# Altium PCB PCB-NCMate-4_2023-08-02.pcbdoc (part 1 of 2)
Units mil, origin at the board's own origin, x right, y up, seen from the top; angles counter-clockwise.
Board outline 7109.99 x 5739.53 mil, 4 copper layers (Top Layer, Mid-Layer 1, Mid-Layer 2, Bottom Layer); 194 components, 159 nets, 662 pads, 368 vias.
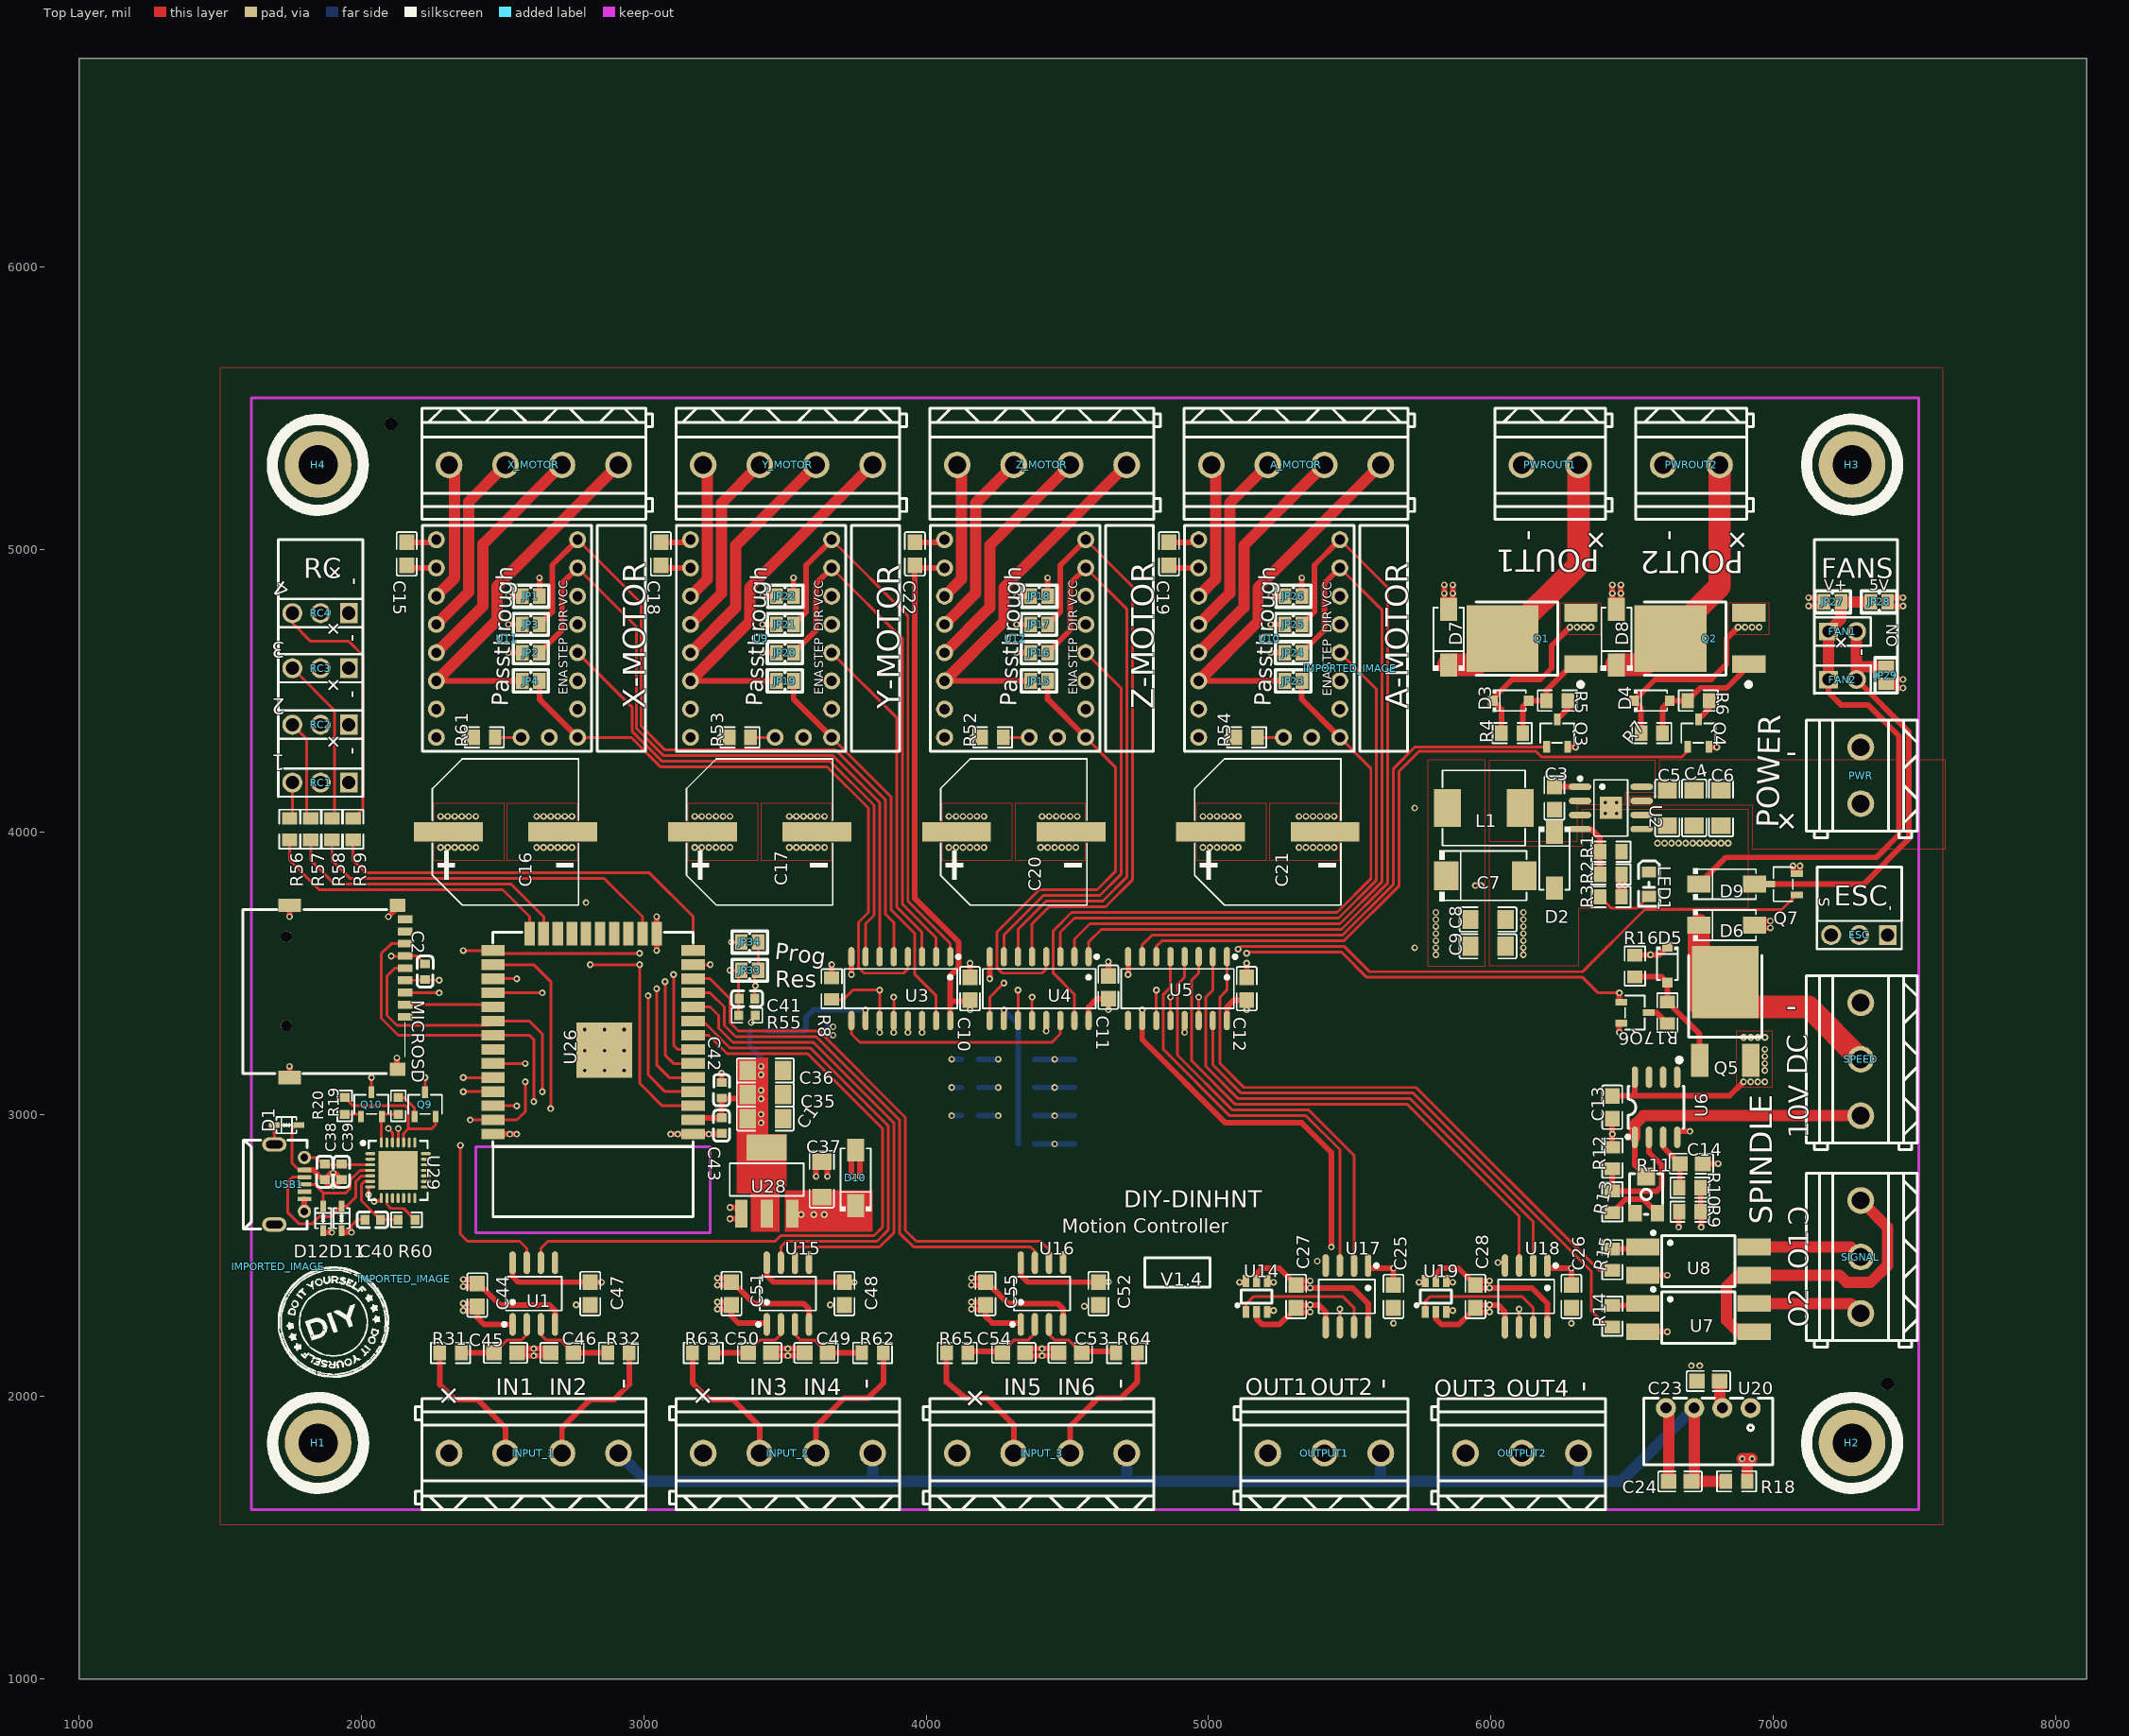
[diagram p0: Top Layer view]
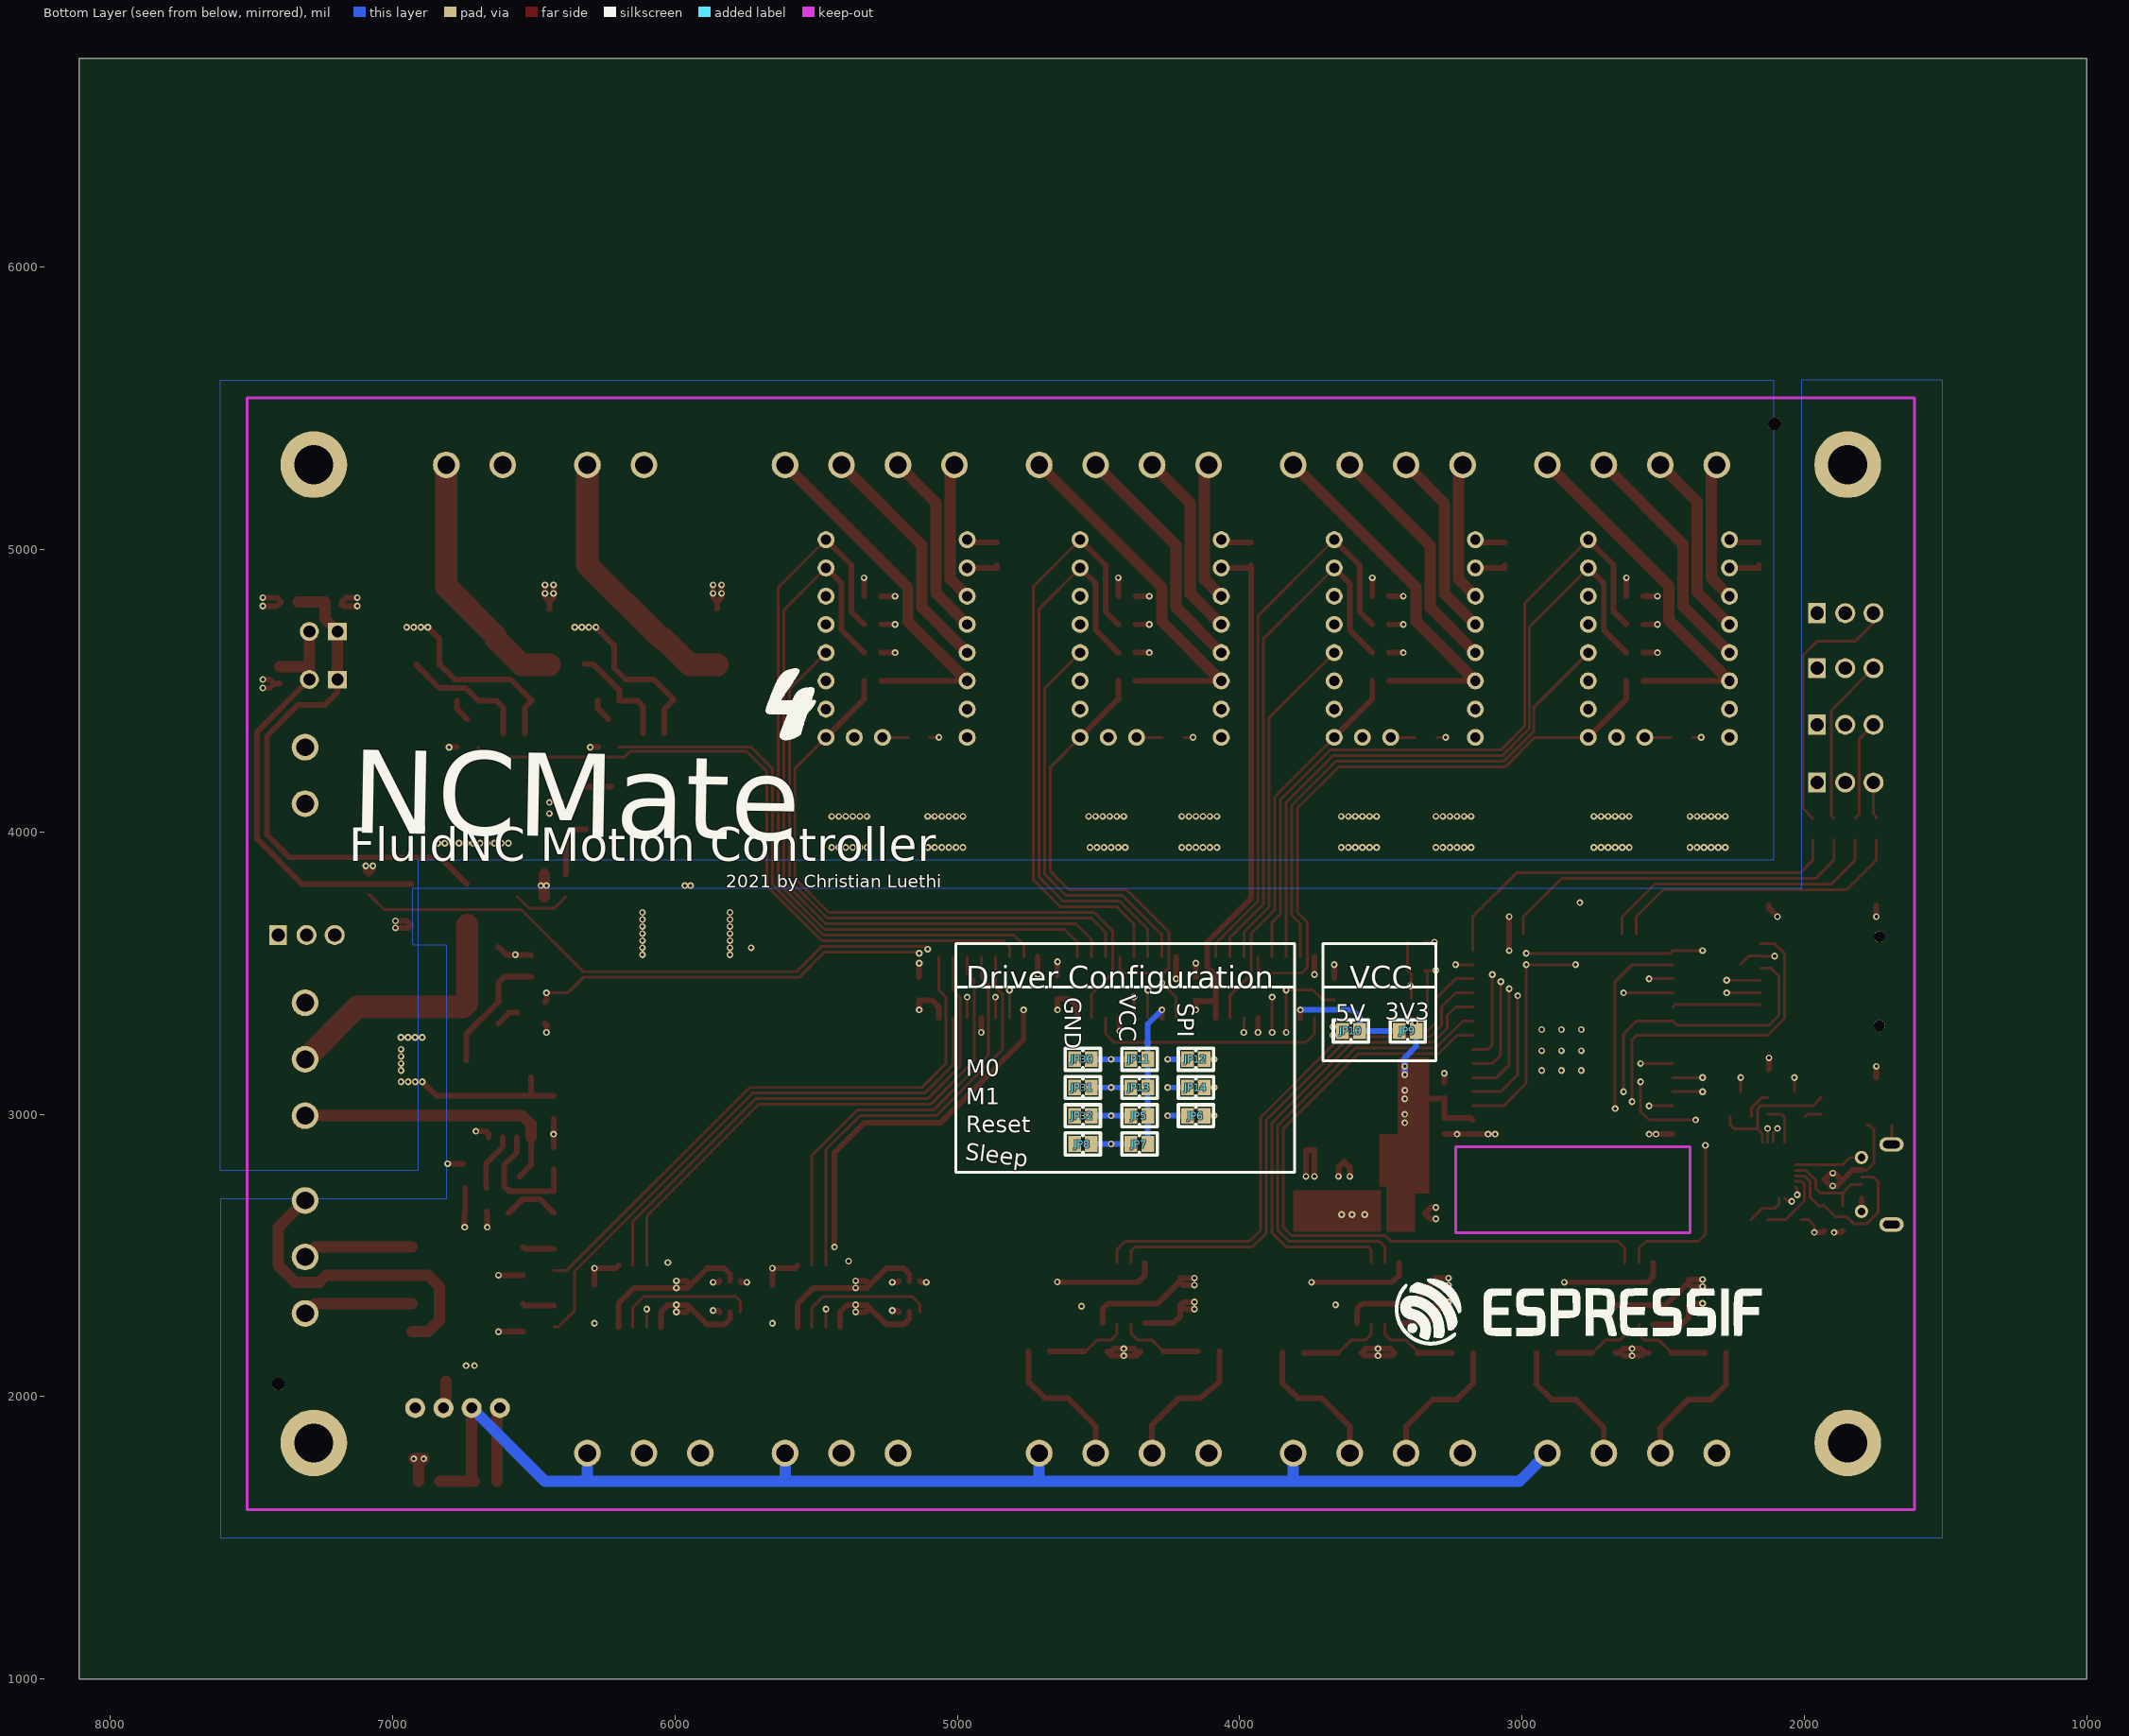
[diagram p1: Bottom Layer view, seen from below]
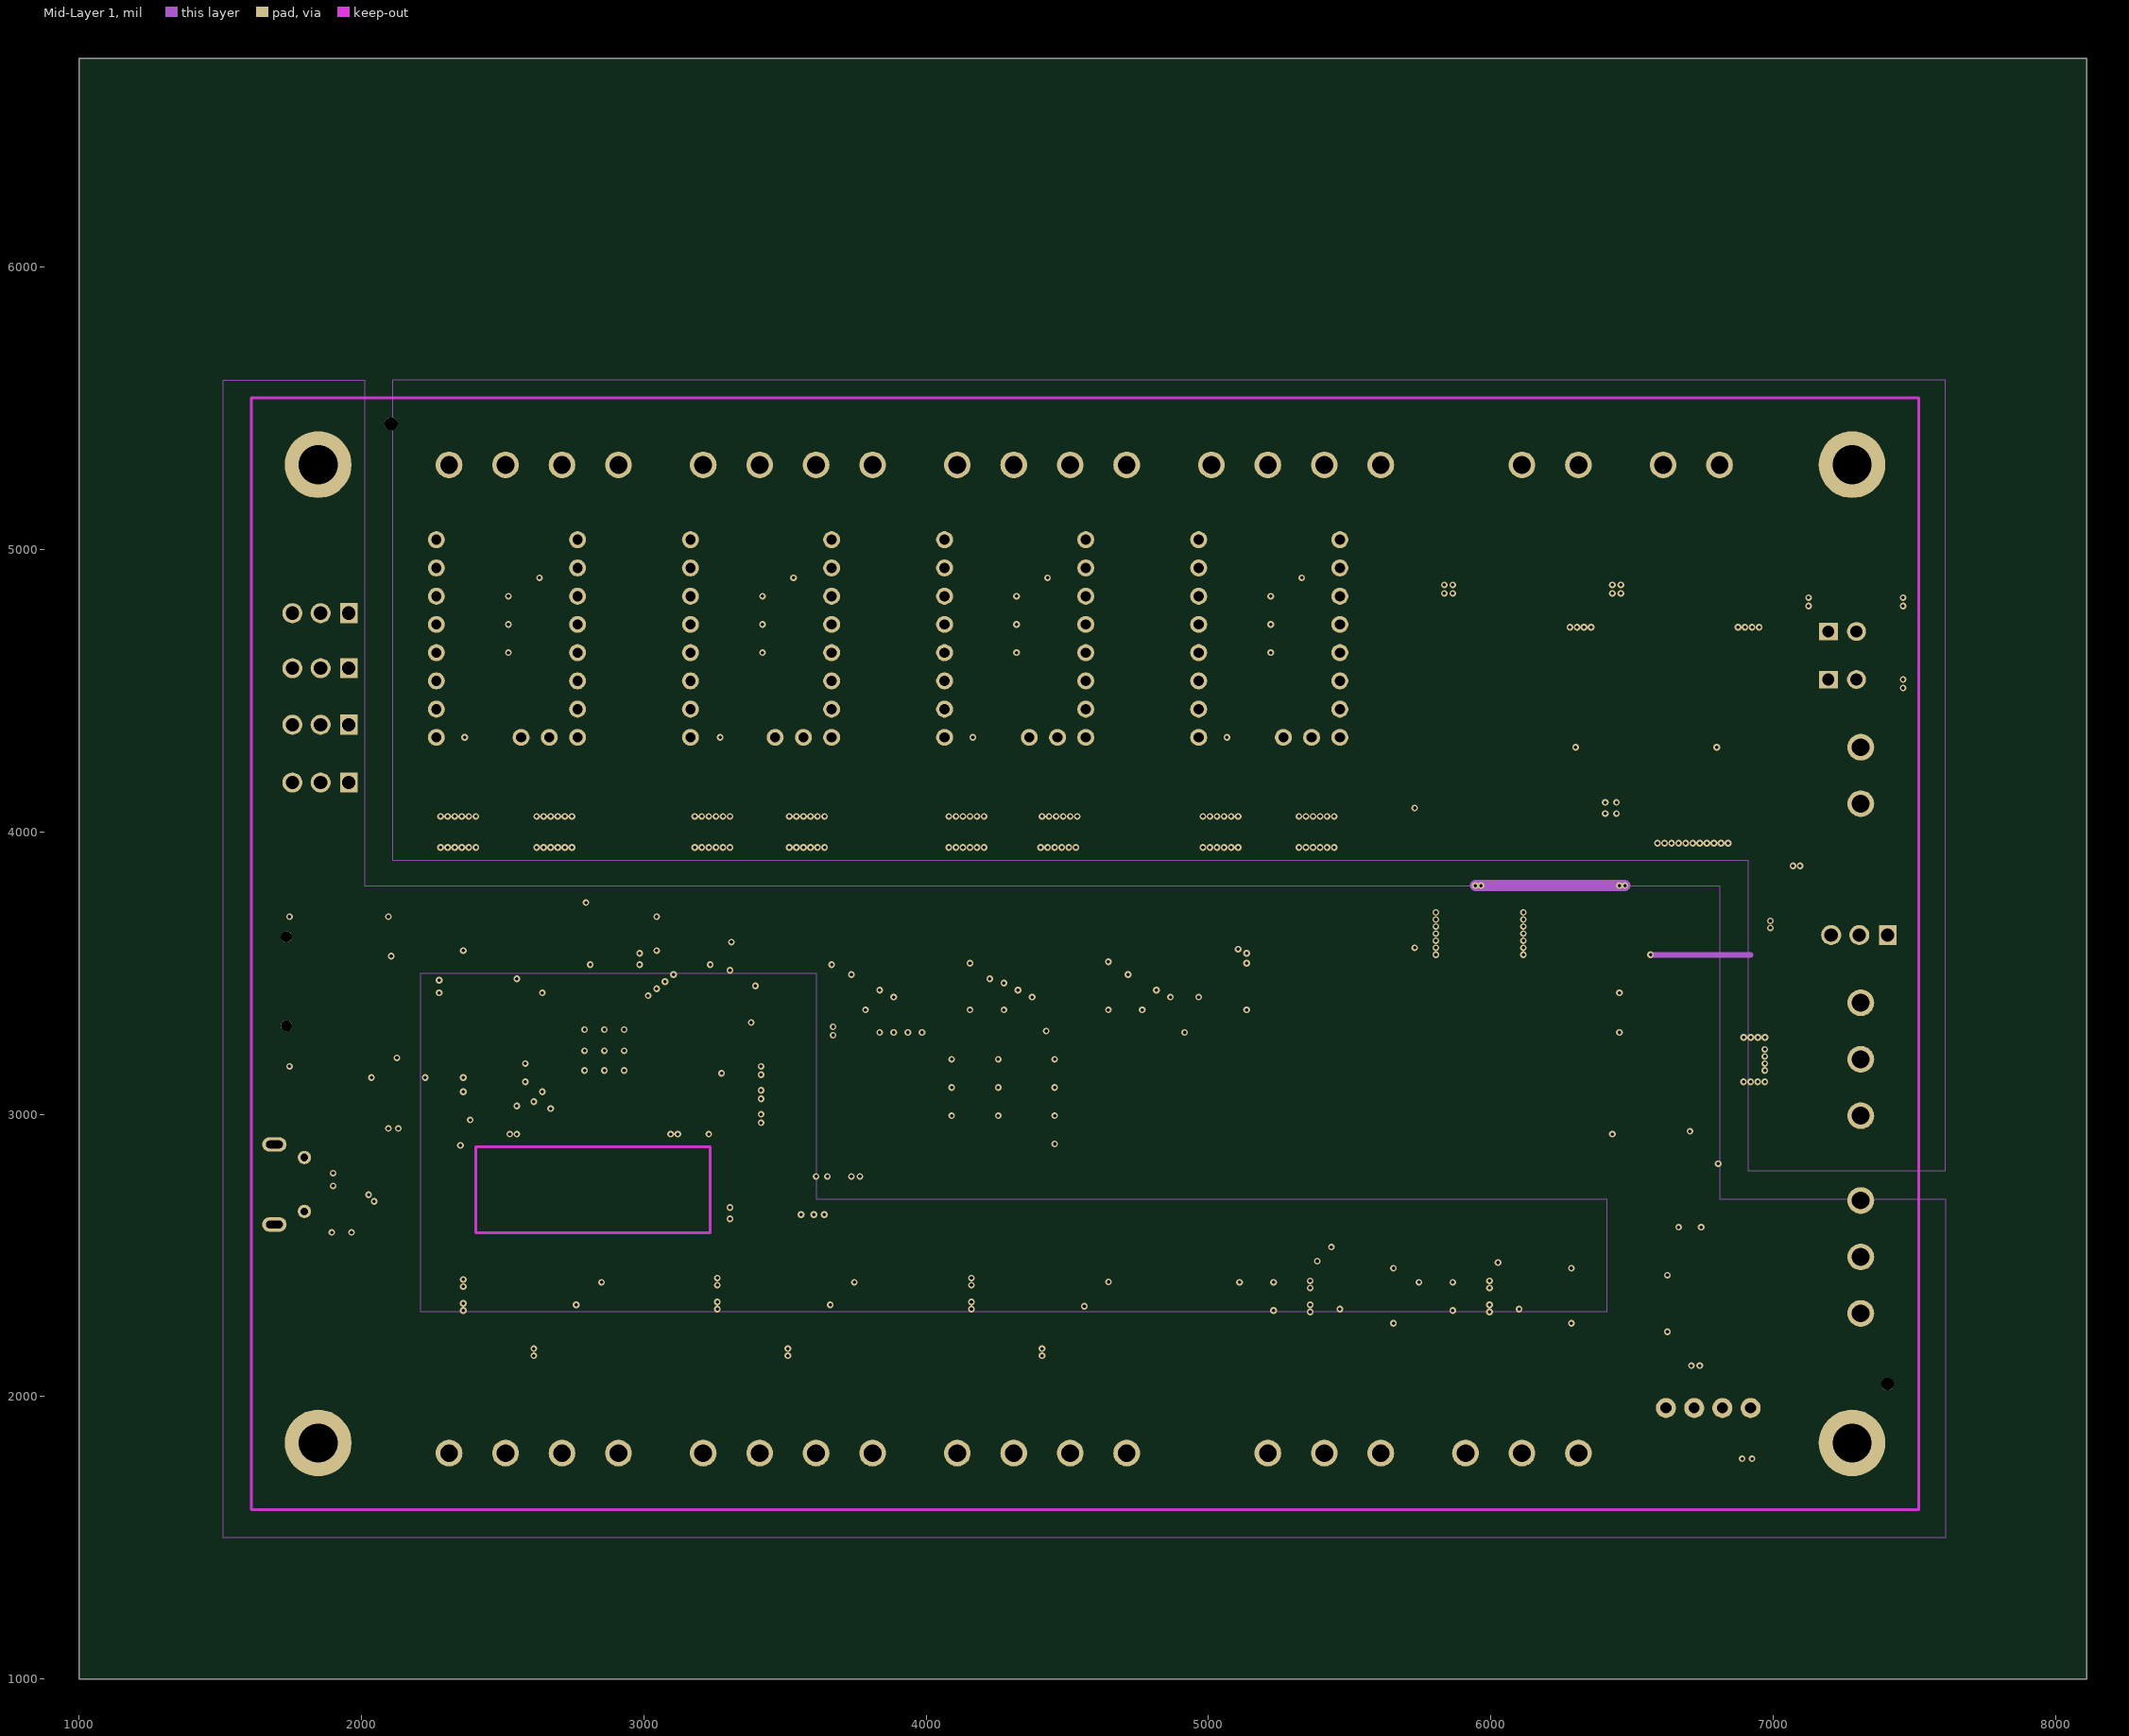
[diagram p2: Mid-Layer 1]
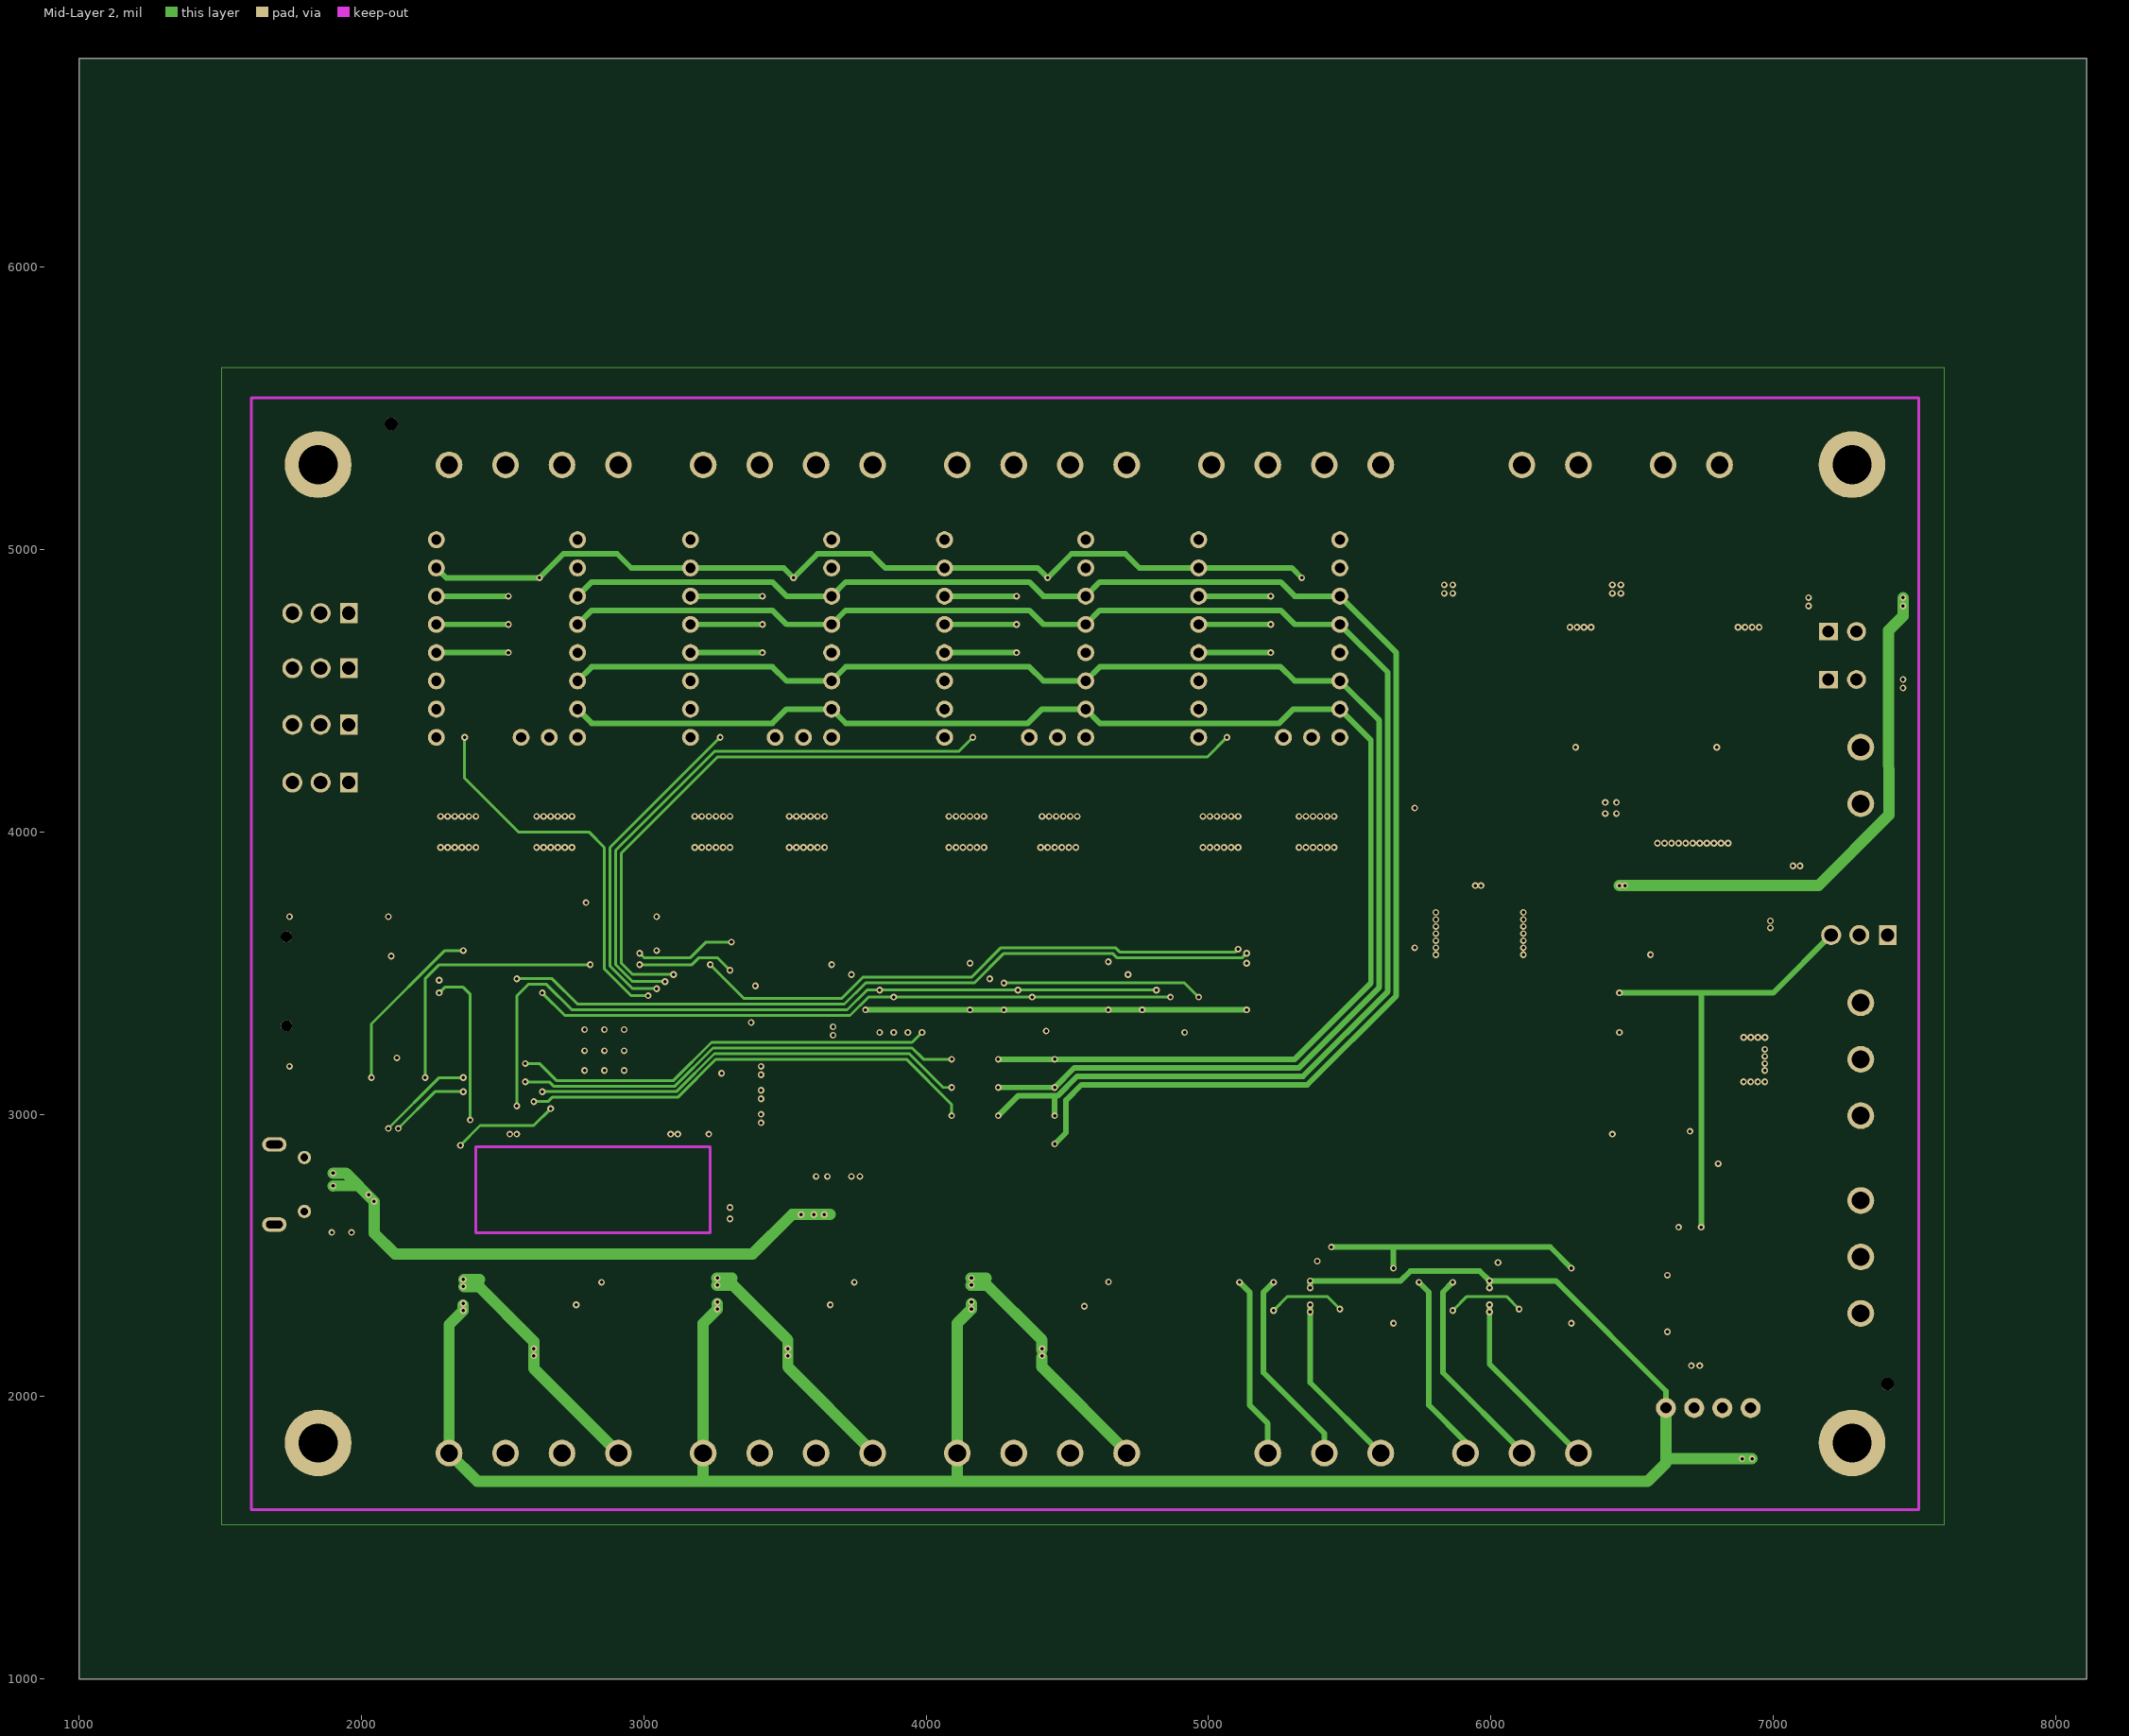
[diagram p3: Mid-Layer 2]

## Layer stack, top to bottom
Top Solder: solder mask 0.4, Solder Resist, Dk 3.5
Top Layer: signal copper 1.4
Dielectric1: dielectric 12.6, FR-4, Dk 4.8
Mid-Layer 1: signal copper 1.4
Dielectric3: dielectric 12.6, FR-4, Dk 4.8
Mid-Layer 2: signal copper 1.4
Dielectric2: dielectric 12.6, FR-4, Dk 4.8
Bottom Layer: signal copper 1.4
Bottom Solder: solder mask 0.4, Solder Resist, Dk 3.5

## Board outline
8109.99,1000 1000,1000 1000,6739.53 8109.99,6739.53

## Design rules (kind name [scope] priority, off if disabled: settings)
Clearance [All] p1: gap=10
PolygonConnect [All] p1: connectstyle=Relief reliefconductorwidth=10 reliefentries=4 polygonreliefangle="90 Angle" airgapwidth=10
RoutingVias [All] p1: holewidth=28 width=50 viastyle="Through Hole" minholewidth=28 minwidth=50 maxholewidth=28 maxwidth=50
SolderMaskExpansion [All] p1: expansion=4
Width [All] p1: maxlimit=10 minlimit=10 preferedwidth=10
30 further rules are at their usual default settings.

## Components (designator, comment, footprint, x,y, rotation, side; value= is the part's Value field where it differs from the comment)
A_MOTOR "DB128L-5.08-4P-GN-S" CONN-TH_4P-5.00_DB128L-5.0-4P-BU-S 5309.99,5300 r180 top
C1 "10uF" C1206 3430,2985 r180 top
C2 "100nF" C0603 2225,3505 r270 top
C3 "10nF" C0805 6224.99,4120 r270 top
C4 "2.2uF" C1206 6719.99,4085 r90 top
C5 "2.2uF" C1206 6624.99,4085 r90 top
C6 "10uF" C1206 6814.99,4085 r90 top
C7 "220uF" CAP-SMD_L7.3-W4.3-R-RD 5979.99,3845 r180 top
C8 "10uF" C1206 5989.99,3690 r180 top
C9 "2.2uF" C1206 5989.99,3595 r180 top
C10 "100nF" C0805 4154.99,3445 r270 top
C11 "100nF" C0805 4644.99,3450 r270 top
C12 "100nF" C0805 5134.99,3445 r270 top
C13 "100nF" C0805 6429.99,3025 r90 top
C14 "100nF" C0805 6709.99,2825 r180 top
C15 "100nF" C0805 2159.99,4985 r270 top
C16 "470uF" CAP-SMD_BD12.5-L13.0-W13.0-FD 2509.99,4000 r0 top
C17 "470uF" CAP-SMD_BD12.5-L13.0-W13.0-FD 3409.99,4000 r0 top
C18 "100nF" C0805 3059.99,4985 r270 top
C19 "100nF" C0805 4859.99,4985 r270 top
C20 "470uF" CAP-SMD_BD12.5-L13.0-W13.0-FD 4309.99,4000 r0 top
C21 "470uF" CAP-SMD_BD12.5-L13.0-W13.0-FD 5210,4000 r0 top
C22 "100nF" C0805 3959.99,4985 r270 top
C23 "100nF" C0805 6769.99,2055 r0 top
C24 "100nF" C0805 6669.99,1700 r180 top
C25 "100nF" C0805 5654.99,2355 r90 top
C26 "100nF" C0805 6284.99,2355 r90 top
C27 "100nF" C0805 5309.99,2355 r90 top
C28 "100nF" C0805 5944.99,2355 r90 top
C35 "10uF" C1206 3430,3070 r180 top
C36 "2.2uF" C1206 3430,3155 r180 top
C37 "10uF" C1206 3629.99,2770 r270 top
C38 "100nF" C0603 1869.32,2796.6 r270 top
C39 "1uF" C0603 1929.32,2796.6 r270 top
C40 "100nF" C0603 2039.32,2626.6 r0 top
C41 "100nF" C0603 3365,3410 r180 top
C42 "1uF" C0603 3275,3085 r270 top
C43 "100nF" C0603 3275,2960 r90 top
C44 "100nF" C0805 2409.99,2360 r270 top
C45 "100nF" C0805 2509.99,2155 r180 top
C46 "100nF" C0805 2709.99,2155 r0 top
C47 "100nF" C0805 2809.99,2365 r90 top
C48 "100nF" C0805 3709.99,2365 r90 top
C49 "100nF" C0805 3609.99,2155 r0 top
C50 "100nF" C0805 3409.99,2155 r180 top
C51 "100nF" C0805 3309.99,2365 r270 top
C52 "100nF" C0805 4609.99,2365 r90 top
C53 "100nF" C0805 4509.99,2155 r0 top
C54 "100nF" C0805 4309.99,2155 r180 top
C55 "100nF" C0805 4209.99,2365 r270 top
D1 "PESD5V0S1BA-N" SOD-323_L1.8-W1.3-LS2.5-BI 1734.32,2961.6 r0 top
D2 "SS54" SMA_L4.4-W2.8-LS5.4-R-RD 6224.99,3900 r270 top
D3 "BZT52C12" SOD-123_L2.7-W1.6-LS3.7-RD 6069.99,4465 r0 top
D4 "BZT52C12" SOD-123_L2.7-W1.6-LS3.7-RD 6569.99,4465 r0 top
D5 "BZT52C12" SOD-123_L2.7-W1.6-LS3.7-RD 6624.99,3530 r270 top
D6 "SS54" SMA_L4.4-W2.8-LS5.4-R-RD 6834.99,3670 r0 top
D7 "SS54" SMA_L4.4-W2.8-LS5.4-R-RD 5849.99,4690 r90 top
D8 "SS54" SMA_L4.4-W2.8-LS5.4-R-RD 6444.99,4690 r90 top
D9 "SS54" SMA_L4.4-W2.8-LS5.4-R-RD 6835,3815 r0 top
D10 "SS54" SMA_L4.4-W2.8-LS5.4-R-RD 3749.99,2775 r90 top
D11 "PESD5V0S1BA-N" SOD-323_L1.8-W1.3-LS2.5-BI 1929.32,2631.6 r90 top
D12 "PESD5V0S1BA-N" SOD-323_L1.8-W1.3-LS2.5-BI 1864.32,2631.6 r90 top
ESC "Header-Male-2.54_1x3" HDR-TH_3P-P2.54-V-M-1 7304.99,3635 r180 top
FAN1 "HDR-M-2.54_1x2" HDR-M-2.54_1X2 7245,4710 r0 top
FAN2 "HDR-M-2.54_1x2" HDR-M-2.54_1X2 7245,4540 r0 top
H1 "M3" "M3 CHASSIS" 1846.21,1836.22 r0 top
H2 "M3" "M3 CHASSIS" 7279.28,1836.22 r0 top
H3 "M3" "M3 CHASSIS" 7279.28,5300.79 r0 top
H4 "M3" "M3 CHASSIS" 1846.21,5300.79 r0 top
IMPORTED_IMAGE "Comment" IMPORTED_IMAGE 1703.97,2460.43 r0 top
IMPORTED_IMAGE "Comment" IMPORTED_IMAGE 2150.38,2418.01 r0 top
IMPORTED_IMAGE "Comment" IMPORTED_IMAGE 5501.47,4579.35 r0 top
INPUT_1 "DB128L-5.08-4P-GN-S" CONN-TH_4P-5.00_DB128L-5.0-4P-BU-S 2609.99,1800 r0 top
INPUT_2 "DB128L-5.08-4P-GN-S" CONN-TH_4P-5.00_DB128L-5.0-4P-BU-S 3509.99,1800 r0 top
INPUT_3 "DB128L-5.08-4P-GN-S" CONN-TH_4P-5.00_DB128L-5.0-4P-BU-S 4409.99,1800 r0 top
JP1 "JUMPER-PAD-2" JUMPER_SOLDER_2#1 2569.99,4835 r180 top
JP2 "JUMPER-PAD-2" JUMPER_SOLDER_2#1 2629.99,4635 r0 top
JP3 "JUMPER-PAD-2" JUMPER_SOLDER_2#1 2629.99,4735 r0 top
JP4 "JUMPER-PAD-2" JUMPER_SOLDER_2#1 2629.99,4535 r0 top
JP5 "JUMPER-PAD-2" JUMPER_SOLDER_2#2 4385.01,2995 r180 bottom
JP6 "JUMPER-PAD-2" JUMPER_SOLDER_2#2 4185.01,2995 r180 bottom
JP7 "JUMPER-PAD-2" JUMPER_SOLDER_2#2 4385.01,2895 r180 bottom
JP8 "JUMPER-PAD-2" JUMPER_SOLDER_2#2 4525.01,2895 r0 bottom
JP9 "JUMPER-PAD-2" JUMPER_SOLDER_2#2 3435,3295 r180 bottom
JP10 "JUMPER-PAD-2" JUMPER_SOLDER_2#2 3575,3295 r0 bottom
JP11 "JUMPER-PAD-2" JUMPER_SOLDER_2#2 4385.01,3195 r180 bottom
JP12 "JUMPER-PAD-2" JUMPER_SOLDER_2#2 4185.01,3195 r180 bottom
JP13 "JUMPER-PAD-2" JUMPER_SOLDER_2#2 4385.01,3095 r180 bottom
JP14 "JUMPER-PAD-2" JUMPER_SOLDER_2#2 4185.01,3095 r180 bottom
JP15 "JUMPER-PAD-2" JUMPER_SOLDER_2#1 4429.99,4535 r0 top
JP16 "JUMPER-PAD-2" JUMPER_SOLDER_2#1 4429.99,4635 r0 top
JP17 "JUMPER-PAD-2" JUMPER_SOLDER_2#1 4429.99,4735 r0 top
JP18 "JUMPER-PAD-2" JUMPER_SOLDER_2#1 4369.99,4835 r180 top
JP19 "JUMPER-PAD-2" JUMPER_SOLDER_2#1 3529.99,4535 r0 top
JP20 "JUMPER-PAD-2" JUMPER_SOLDER_2#1 3529.99,4635 r0 top
JP21 "JUMPER-PAD-2" JUMPER_SOLDER_2#1 3529.99,4735 r0 top
JP22 "JUMPER-PAD-2" JUMPER_SOLDER_2#1 3469.99,4835 r180 top
JP23 "JUMPER-PAD-2" JUMPER_SOLDER_2#1 5329.99,4535 r0 top
JP24 "JUMPER-PAD-2" JUMPER_SOLDER_2#1 5329.99,4635 r0 top
JP25 "JUMPER-PAD-2" JUMPER_SOLDER_2#1 5329.99,4735 r0 top
JP26 "JUMPER-PAD-2" JUMPER_SOLDER_2#1 5269.99,4835 r180 top
JP27 "JUMPER-PAD-2" JUMPER_SOLDER_2#1 7180,4815 r180 top
JP28 "JUMPER-PAD-2" JUMPER_SOLDER_2#1 7405,4815 r0 top
JP29 "JUMPER-PAD-2" JUMPER_SOLDER_2#1 7400,4585 r90 top
JP30 "JUMPER-PAD-2" JUMPER_SOLDER_2#2 4525.01,3195 r0 bottom
JP31 "JUMPER-PAD-2" JUMPER_SOLDER_2#2 4525,3095 r0 bottom
JP32 "JUMPER-PAD-2" JUMPER_SOLDER_2#2 4525.01,2995 r0 bottom
JP33 "JUMPER-PAD-2" JUMPER_SOLDER_2#1 3345,3510 r180 top
JP34 "JUMPER-PAD-2" JUMPER_SOLDER_2#1 3345,3610 r180 top
L1 "15uH" IND-SMD_L7.3-W6.6 5974.99,4085 r0 top
LED1 "0805G (Green)" LED0805-RD_GREEN 6559.99,3815 r270 top
MICROSD "TF-01A" TF-SMD_TF-01A 1950,3435 r270 top
OUTPUT1 "DB128L-5.08-3P" CONN-TH_DB128L-5.08-3P 5409.99,1800 r0 top
OUTPUT2 "DB128L-5.08-3P" CONN-TH_DB128L-5.08-3P 6109.99,1800 r0 top
PWR "DB128L-5.08-2P" CONN-TH_2P-P5.08_DB128L-5.08-2P 7309.99,4200 r90 top
PWROUT1 "DB128L-5.08-2P" CONN-TH_2P-P5.08_DB128L-5.08-2P 6209.99,5300 r180 top
PWROUT2 "DB128L-5.08-2P" CONN-TH_2P-P5.08_DB128L-5.08-2P 6709.99,5300 r180 top
Q1 "IRFR5305TRPBF" TO-252-3_L6.5-W5.8-P4.58-TR 6179.99,4685 r180 top
Q2 "IRFR5305TRPBF" TO-252-3_L6.5-W5.8-P4.58-TR 6774.99,4685 r180 top
Q3 "AO3400A" SOT-23-3_L2.9-W1.6-P1.90-LS2.8-BR 6234.99,4350 r270 top
Q4 "AO3400A" SOT-23-3_L2.9-W1.6-P1.90-LS2.8-BR 6734.99,4350 r270 top
Q5 "IRFR5305TRPBF" TO-252-3_L6.5-W5.8-P4.58-TR 6829.99,3330 r90 top
Q6 "AO3400A" SOT-23-3_L2.9-W1.6-P1.90-LS2.8-BR 6509.99,3360 r180 top
Q7 "AO3400A" SOT-23-3_L2.9-W1.6-P1.90-LS2.8-BR 7035,3815 r0 top
Q9 "S8050_C2146" SOT-23-3_L3.0-W1.7-P0.95-LS2.9-BR 2224.99,3035 r270 top
Q10 "S8050_C2146" SOT-23-3_L3.0-W1.7-P0.95-LS2.9-BR 2034.99,3035 r270 top
R1 "2.2K" R0805 6424.99,3930 r0 top
R2 "8.2K" R0805 6424.99,3850 r180 top
R3 "3K" R0805 6425,3770 r0 top
R4 "10K" R0805 6074.99,4350 r0 top
R5 "10K" R0805 6234.99,4465 r0 top
R6 "10K" R0805 6734.99,4465 r0 top
R7 "10K" R0805 6569.99,4350 r0 top
R8 "10K" R0805 3664.99,3445 r90 top
R9 "10K" R0805 6704.99,2655 r180 top
R10 "10K" R0805 6704.99,2740 r180 top
R11 "22K" RES-ADJ-SMD_VG039NCH 6549.99,2715 r270 top
R12 "10K" R0805 6429.99,2845 r270 top
R13 "4.7K" R0805 6429.99,2690 r270 top
R14 "220" R0805 6429.99,2285 r90 top
R15 "220" R0805 6429.99,2485 r90 top
R16 "10K" R0805 6509.99,3525 r270 top
R17 "10K" R0805 6624.99,3360 r270 top
R18 "220" R0805 6869.99,1700 r0 top
R19 "10K" R0603 2129.99,3030 r270 top
R20 "10K" R0603 1939.99,3030 r270 top
R31 "10K" R0805 2314.99,2155 r180 top
R32 "10K" R0805 2909.99,2155 r0 top
R52 "330" R0805 4235,4335 r180 top
R53 "330" R0805 3340,4335 r180 top
R54 "330" R0805 5135,4335 r180 top
R55 "10K" R0603 3365,3350 r0 top
R56 "220" R0805 1744.99,4010 r90 top
R57 "220" R0805 1819.99,4010 r90 top
R58 "220" R0805 1894.99,4010 r90 top
R59 "220" R0805 1969.99,4010 r90 top
R60 "10K" R0603 2159.32,2626.6 r180 top
R61 "330" R0805 2435,4335 r180 top
R62 "10K" R0805 3809.99,2155 r0 top
R63 "10K" R0805 3209.99,2155 r180 top
R64 "10K" R0805 4709.99,2155 r0 top
R65 "10K" R0805 4109.99,2155 r180 top
RC1 "Header-Male-2.54_1x3" HDR-TH_3P-P2.54-V-M-1 1854.99,4175 r180 top
RC2 "Header-Male-2.54_1x3" HDR-TH_3P-P2.54-V-M-1 1854.99,4380 r180 top
RC3 "Header-Male-2.54_1x3" HDR-TH_3P-P2.54-V-M-1 1854.99,4580 r180 top
RC4 "Header-Male-2.54_1x3" HDR-TH_3P-P2.54-V-M-1 1854.99,4775 r180 top
SIGNAL "DB128L-5.08-3P" CONN-TH_DB128L-5.08-3P 7309.99,2495 r90 top
SPEED "DB128L-5.08-3P" CONN-TH_DB128L-5.08-3P 7309.99,3195 r90 top
U1 "CBMUD1200HAS8" SOIC-8_L4.9-W3.9-P1.27-LS6.0-BL 2609.99,2365 r0 top
U2 "TPS5430DDAR" SOIC-8_L5.0-W4.0-P1.27-LS6.0-BL-EP2.0 6424.99,4085 r270 top
U3 "74AHCT595D,118" SOP-16_L10.0-W3.9-P1.27-LS6.0-BL 3910,3445 r180 top
U4 "74AHCT595D,118" SOP-16_L10.0-W3.9-P1.27-LS6.0-BL 4400,3445 r180 top
U5 "74AHCT595D,118" SOP-16_L10.0-W3.9-P1.27-LS6.0-BL 4890,3445 r180 top
U6 "LM358DR2G" SOIC-8_L5.0-W4.0-P1.27-LS6.0-BL 6584.99,3025 r0 top
U7 "EL817S1(C)(TU)-F" OPTO-SMD-4_L4.6-W6.5-P2.54-LS10.3-TL 6734.99,2280 r0 top
U8 "EL817S1(C)(TU)-F" OPTO-SMD-4_L4.6-W6.5-P2.54-LS10.3-TL 6734.99,2480 r0 top
U9 "SilentStepStick_TMC5160_V1.4" SILENTSTEPSTICK_TMC5160 3364.99,5035 r180 top
U10 "SilentStepStick_TMC5160_V1.4" SILENTSTEPSTICK_TMC5160 5164.99,5035 r180 top
U11 "SilentStepStick_TMC5160_V1.4" SILENTSTEPSTICK_TMC5160 2464.99,5035 r180 top
U12 "SilentStepStick_TMC5160_V1.4" SILENTSTEPSTICK_TMC5160 4264.99,5035 r180 top
U14 "74LVC2G17GV,125" SC-74-6_L3.0-W1.5-P0.95-LS2.8-BL 5169.99,2355 r0 top
U15 "CBMUD1200HAS8" SOIC-8_L4.9-W3.9-P1.27-LS6.0-BL 3509.99,2365 r0 top
U16 "CBMUD1200HAS8" SOIC-8_L4.9-W3.9-P1.27-LS6.0-BL 4409.99,2365 r0 top
U17 "CBMUD1200HAS8" SOIC-8_L4.9-W3.9-P1.27-LS6.0-BL 5489.99,2355 r180 top
U18 "CBMUD1200HAS8" SOIC-8_L4.9-W3.9-P1.27-LS6.0-BL 6124.99,2355 r180 top
U19 "74LVC2G17GV,125" SC-74-6_L3.0-W1.5-P0.95-LS2.8-BL 5804.99,2355 r0 top
U20 "B0505S-1W_C882272" PWRM-TH_BXXXXS-1WR3 6769.99,1960 r180 top
U26 "ESP32-WROOM-32D(16MB)" WIFIM-SMD_39P-L25.5-W18.0-P1.27-BL 2820,3285 r90 top
U28 "AMS1117-3.3" SOT-223-3_L6.5-W3.4-P2.30-LS7.0-BR 3435,2765 r270 top
U29 "CP2102-GMR" QFN-28_L5.0-W5.0-P0.50-BL-EP 2129.32,2801.6 r270 top
USB1 "micro USBFemale" MICRO-USB-SMD_5P-P0.65-H-F_C10418 1744.32,2751.6 r270 top
X_MOTOR "DB128L-5.08-4P-GN-S" CONN-TH_4P-5.00_DB128L-5.0-4P-BU-S 2609.99,5300 r180 top
Y_MOTOR "DB128L-5.08-4P-GN-S" CONN-TH_4P-5.00_DB128L-5.0-4P-BU-S 3509.99,5300 r180 top
Z_MOTOR "DB128L-5.08-4P-GN-S" CONN-TH_4P-5.00_DB128L-5.0-4P-BU-S 4409.99,5300 r180 top

## Footprints (in the part's own frame and the unit in brackets; to place one, negate y for a bottom-side part, rotate by r counter-clockwise, add the part's x,y. Pads: shape width x height; smd on the part's side, far side on the other; paste and mask are expansions set on the pad)
C0603 [mm]
  rect 0.8x0.9 smd paste+0 mask+0.051: 1(-0.7,0) 2(0.7,0)
  silkscreen extent -1.41,-0.71 1.39,0.72
C0805 [mm]
  rect 1.41x1.35 smd paste-100 mask+0.051: 1(-1.03,0) 2(1.03,0)
  silkscreen extent -1.96,-0.9 1.96,0.9
C1206 [mm]
  rect 1.485x1.728 smd paste-100 mask+0.051: 1(-1.593,0) 2(1.593,0)
  silkscreen extent -2.56,-1.09 2.56,1.09
CAP-SMD_BD12.5-L13.0-W13.0-FD [mm]
  rect 6.2x1.75 smd paste+0 mask+0.051: 1(-5.145,0) 2(5.145,0)
  silkscreen extent -6.58,-6.58 6.58,6.58
CAP-SMD_L7.3-W4.3-R-RD [mil]
  rect 86.91x102.05 smd paste+0 mask+2: 1(138.24,0) 2(-138.24,0)
  silkscreen extent -147,-91 162,91
CONN-TH_2P-P5.08_DB128L-5.08-2P [mm]
  round 2.4 hole 1.6 paste+0 mask+0.051: 1(-2.54,0) 2(2.54,0)
  silkscreen extent -5.59,-5.1 4.99,4.9
CONN-TH_4P-5.00_DB128L-5.0-4P-BU-S [mm]
  round 2.4 hole 1.6 paste+0 mask+0.051: 1(-7.62,0) 2(-2.54,0) 3(2.54,0) 4(7.62,0)
  silkscreen extent -10.67,-5.1 10.07,4.9
CONN-TH_DB128L-5.08-3P [mm]
  round 2.4 hole 1.6 paste+0 mask+0.051: 1(-5.08,0) 2(0,0) 3(5.08,0)
  silkscreen extent -8.13,-5.1 7.53,4.9
HDR-M-2.54_1X2 [mm]
  rect 1.7x1.575 hole 1.1 paste+0 mask+0.051: 1(-1.27,0)
  round 1.7 hole 1.1 paste+0 mask+0.051: 2(1.27,0)
  silkscreen extent -2.54,-1.27 2.54,1.27
HDR-TH_3P-P2.54-V-M-1 [mm]
  rect 1.575x1.8 hole 1.2 paste+0 mask+0.051: 1(-2.54,0)
  round 1.8 hole 1.2 paste+0 mask+0.051: 2(0,0) 3(2.54,0)
  silkscreen extent -3.81,-1.27 3.81,1.27
IMPORTED_IMAGE [mil]
  silkscreen extent 0,-394 394,0
IND-SMD_L7.3-W6.6 [mm]
  rect 2.424x3.42 smd paste+0 mask+0.051: 1(3.278,0) 2(-3.278,0)
  silkscreen extent -3.73,-3.38 3.73,3.38
JUMPER_SOLDER_2#1 [mil]
  rect 45x56 smd paste+0 mask+4: 1(-60,0) 2(0,0)
  silkscreen extent -93,-39 32,39
JUMPER_SOLDER_2#2 [mil]
  rect 45x56 smd paste+0 mask+4: 1(60,0) 2(0,0)
  silkscreen extent -32,-39 93,39
LED0805-RD_GREEN [mm]
  rect 1x1.25 smd paste+0 mask+0.051: 1(-1.1,0) 2(1.1,0)
  silkscreen extent -2.1,-0.95 1.98,0.96
"M3 CHASSIS" [mm]
  round 6 hole 3.5 paste+0 mask+0.102: 1(0,0)
MICRO-USB-SMD_5P-P0.65-H-F_C10418 [mm]
  oval 1.3x2.2 hole 0.7 slot 1.5 at 90 deg paste+0 mask+0.051: 0(-3.6,-1.35) 0(3.6,-1.35)
  round 1.2 hole 0.7 paste+0 mask+0.051: 0(-2.425,1.35) 0(2.425,1.35)
  rect 0.4x1.25 smd paste-100 mask+0.051: 1(-1.3,1.35) 2(-0.65,1.35) 3(0,1.35) 4(0.65,1.35) 5(1.3,1.35)
  silkscreen extent -4,-4.15 4,1.61
OPTO-SMD-4_L4.6-W6.5-P2.54-LS10.3-TL [mm]
  rect 3x1.5 smd paste+0 mask+0.051: 1(-5,1.27) 2(-5,-1.27) 3(5,-1.27) 4(5,1.27)
  silkscreen extent -4.21,-2.3 3.3,2.69
PWRM-TH_BXXXXS-1WR3 [mm]
  round 1.8 hole 1 paste+0 mask+0.051: 1(-3.81,0) 2(-1.27,0) 3(1.27,0) 4(3.81,0)
  silkscreen extent -5.8,-0.9 5.8,5.1
QFN-28_L5.0-W5.0-P0.50-BL-EP [mm]
  oval 0.28x0.9 smd paste+0 mask+0.051: 1(-1.501,-2.5) 2(-1.001,-2.5) 3(-0.501,-2.5) 4(0,-2.5) 5(0.5,-2.5) 6(1.001,-2.5) 7(1.501,-2.5) 15(1.501,2.5) 16(1.001,2.5) 17(0.5,2.5) 18(0,2.5) 19(-0.501,2.5) 20(-1.001,2.5) 21(-1.501,2.5)
  oval 0.9x0.28 smd paste+0 mask+0.051: 8(2.5,-1.501) 9(2.5,-1.001) 10(2.5,-0.5) 11(2.5,0) 12(2.5,0.5) 13(2.5,1.001) 14(2.5,1.501) 22(-2.5,1.501) 23(-2.5,1.001) 24(-2.5,0.5) 25(-2.5,0) 26(-2.5,-0.5) 27(-2.5,-1.001) 28(-2.5,-1.501)
  rect 3.5x3.5 smd paste+0 mask+0.051: 29(0,0)
  silkscreen extent -2.65,-3.3 2.65,2.65
R0603 [mil]
  rect 31.75x34.02 smd paste-3937.01 mask+2: 1(-29.66,0) 2(29.66,0)
  silkscreen extent -55,-26 55,26
R0805 [mil]
  rect 44.59x54.21 smd paste-3937.01 mask+2: 1(-38.04,0) 2(38.04,0)
  silkscreen extent -69,-36 69,36
RES-ADJ-SMD_VG039NCH [mm]
  rect 1.5x1.2 smd paste+0 mask+0.051: 1(1.65,-1) 3(1.65,1)
  rect 1.6x1.6 smd paste+0 mask+0.051: 2(-1.65,0)
  silkscreen extent -1.9,-1.5 1.75,1.5
SC-74-6_L3.0-W1.5-P0.95-LS2.8-BL [mil]
  rect 24x43 smd paste+0 mask+2: 1(-37.4,-55) 2(0,-55) 3(37.4,-55) 4(37.4,55) 5(0,55) 6(-37.4,55)
  silkscreen extent -74,-37 55,24
SILENTSTEPSTICK_TMC5160 [mil]
  round 60 hole 36 paste+0 mask+4: 1(-300,700) 2(-300,600) 3(-300,500) 4(-300,400) 5(-300,300) 6(-300,200) 7(-300,100) 8(-300,0) 9(200,700) 10(200,600) 11(200,500) 12(200,400) 13(200,300) 14(200,200) 15(200,100) 16(200,0) 17(-200,700) 18(-100,700)
  silkscreen extent -350,-50 250,750
SMA_L4.4-W2.8-LS5.4-R-RD [mil]
  rect 81.2x60.59 smd paste+0 mask+2: 1(98.57,0) 2(-98.57,0)
  silkscreen extent -119,-56 104,56
SOD-123_L2.7-W1.6-LS3.7-RD [mm]
  rect 0.88x0.96 smd paste+0 mask+0.051: 1(-1.61,0) 2(1.61,0)
  silkscreen extent -1.6,-1 1.38,1
SOD-323_L1.8-W1.3-LS2.5-BI [mm]
  rect 0.985x0.49 smd paste+0 mask+0.051: 1(-1.117,0) 2(1.117,0)
  silkscreen extent -0.9,-0.73 0.9,0.73
SOIC-8_L4.9-W3.9-P1.27-LS6.0-BL [mm]
  oval 0.588x2.045 smd paste+0 mask+0.051: 1(-1.905,-2.773) 2(-0.635,-2.773) 3(0.635,-2.773) 4(1.905,-2.773) 5(1.905,2.773) 6(0.635,2.773) 7(-0.635,2.773) 8(-1.905,2.773)
  silkscreen extent -2.8,-2.92 2.53,1.52
SOIC-8_L5.0-W4.0-P1.27-LS6.0-BL [mil]
  oval 22.38x76.78 smd paste+0 mask+2: 1(-75,-106.5) 2(-25,-106.5) 3(25,-106.5) 4(75,-106.5) 5(75,106.5) 6(25,106.5) 7(-25,106.5) 8(-75,106.5)
  silkscreen extent -106,-111 98,75
SOIC-8_L5.0-W4.0-P1.27-LS6.0-BL-EP2.0 [mm]
  oval 0.574x2.038 smd paste+0 mask+0.051: 1(-1.905,-2.769) 2(-0.635,-2.769) 3(0.635,-2.769) 4(1.905,-2.769) 5(1.905,2.769) 6(0.635,2.769) 7(-0.635,2.769) 8(-1.905,2.769)
  rect 2x2 smd paste+0 mask+0.051: 9(0,0)
  silkscreen extent -2.79,-2.92 2.53,1.52
SOP-16_L10.0-W3.9-P1.27-LS6.0-BL [mm]
  oval 0.56x1.745 smd paste+0 mask+0.051: 1(-4.445,-2.873) 2(-3.175,-2.873) 3(-1.905,-2.873) 4(-0.635,-2.873) 5(0.635,-2.873) 6(1.905,-2.873) 7(3.175,-2.873) 8(4.445,-2.873) 9(4.445,2.873) 10(3.175,2.873) 11(1.905,2.873) 12(0.635,2.873) 13(-0.635,2.873) 14(-1.905,2.873) 15(-3.175,2.873) 16(-4.445,2.873)
  silkscreen extent -5.33,-3.02 5.08,1.77
SOT-23-3_L2.9-W1.6-P1.90-LS2.8-BR [mm]
  rect 1.07x0.6 smd paste+0 mask+0.051: 1(1.235,-0.95) 2(1.235,0.95) 3(-1.235,0)
  silkscreen extent -0.88,-1.54 0.88,1.54
SOT-23-3_L3.0-W1.7-P0.95-LS2.9-BR [mm]
  rect 1.037x0.532 smd paste+0 mask+0.051: 1(1.101,-0.95) 2(1.101,0.95) 3(-1.101,0)
  silkscreen extent -0.86,-1.53 0.86,1.53
SOT-223-3_L6.5-W3.4-P2.30-LS7.0-BR [mm]
  rect 2.5x1.1 smd paste+0 mask+0.051: 1(2.97,-2.3) 2(2.97,0) 3(2.97,2.3)
  rect 2.34x3.6 smd paste+0 mask+0.051: 4(-2.97,0)
  silkscreen extent -1.57,-3.33 1.37,3.33
TF-SMD_TF-01A [mm]
  rect 0.7x1.3 smd paste+0 mask+0.051: 1(2.292,5.2) 2(1.192,5.198) 3(0.096,5.2) 4(-1.004,5.2) 5(-2.103,5.2) 6(-3.201,5.2) 7(-4.297,5.2) 8(-5.395,5.2) 9(-6.499,5.2)
  rect 1.2x1.397 smd paste+0 mask+0.051: 10(-7.747,4.502) 13(6.985,4.502)
  rect 1.2x2 smd paste+0 mask+0.051: 11(-7.747,-5.2) 12(7.747,-5.2)
  round 1 hole 1 unplated paste+0: ""(-4.915,-5.49) ""(3.084,-5.487)
  silkscreen extent -7.37,-9.4 7.37,5.14
TO-252-3_L6.5-W5.8-P4.58-TR [mm]
  rect 3x1.6 smd paste+0 mask+0.051: 1(-3.528,2.299) 3(-3.522,-2.299)
  rect 6.5x6 smd paste+0 mask+0.051: 2(3.528,-0.001)
  silkscreen extent -3.7,-3.3 5.9,4.34
WIFIM-SMD_39P-L25.5-W18.0-P1.27-BL [mm]
  rect 0.95x2.1 smd paste+0 mask+0.051: 1(-9.015,-9) 2(-7.745,-9) 3(-6.475,-9) 4(-5.205,-9) 5(-3.935,-9) 6(-2.665,-9) 7(-1.395,-9) 8(-0.125,-9) 9(1.145,-9) 10(2.415,-9) 11(3.685,-9) 12(4.955,-9) 13(6.225,-9) 14(7.495,-9) 25(7.495,9) 26(6.225,9) 27(4.955,9) 28(3.685,9) 29(2.415,9) 30(1.145,9) 31(-0.125,9) 32(-1.395,9) 33(-2.665,9) 34(-3.935,9) 35(-5.205,9) 36(-6.475,9) 37(-7.745,9) 38(-9.015,9)
  rect 2.1x0.95 smd paste+0 mask+0.051: 15(9.015,-5.715) 16(9.015,-4.445) 17(9.015,-3.175) 18(9.015,-1.905) 19(9.015,-0.635) 20(9.015,0.635) 21(9.015,1.905) 22(9.015,3.175) 23(9.015,4.445) 24(9.015,5.715)
  rect 5x5 smd paste+0 mask+0.051: 39(-1.472,-1.017)
  silkscreen extent -16.44,-9.02 9.12,9.02

## Free pads (board coordinates)
  round 45.35 hole 45.35 unplated paste+0: ""(2105,5445) ""(7405,2045)

## Via types
v1: diameter 24, hole 12, Top Layer to Bottom Layer, tented both sides, 368 vias

## Nets (pads, with @x,y where several pads share a name; then routed paths per layer and width w, separated by ;. In a path a pad name is that pad's centre, name@x,y a point inside that pad or via, vN(x,y) a via of type N, cw(c..) or ccw(c..) an arc to the next point about the centre after c; other vN are vias at no path point)
+3V3: C1.2 C2.2 C35.2 C36.2 C42.2 C43.2 C47.2 C48.2 C52.2 JP9.1 MICROSD.4 R55.2 U1.8 U15.8 U16.8 U26.2 U28.2 U28.4 | length 1739.6
  Top Layer w10: MICROSD.4@2154.73,3474.52 v1(2275,3475) ; v1(3380,3325) 3379.99,3330 3394.69,3344.7 R55.2@3394.66,3350
  Top Layer w20: U1.8@2534.99,2474.15 2534.99,2425 2554.44,2405.55 C47.2@2809.99,2405.55 ; C47.2@2809.99,2405.5 v1(2849.99,2405) ; U26.2@3174.32,2980.07 3181.81,2987.56 C43.2@3275,2987.55 C42.2@3275,3057.45 3277.44,3055 v1(3415,3055) ; U15.8@3434.99,2474.15 3434.99,2430 3459.44,2405.55 C48.2@3709.99,2405.55 ; C48.2@3709.99,2405.5 v1(3745.57,2405.06) ; U16.8@4334.99,2474.15 4334.99,2430 4359.44,2405.55 C52.2@4609.99,2405.55 ; C52.2@4609.99,2405.5 v1(4645.57,2406.25)
  Bottom Layer w20: JP9.1@3375,3295 3374.99,3240 3414.99,3200 v1(3415,3140)
  other v1: 3415,2970 3415,3000 3415,3085 3415,3170
+5V: C7.1 C8.2 C9.2 C23.2 D10.1 JP10.1 JP28.2 L1.2 R2.1 R3.2 RC1.2 RC2.2 RC3.2 RC4.2 U20.2 | length 3000.7
  Top Layer w20: v1(3734.99,2780) 3734.99,2873.6 D10.1@3749.99,2873.57 3764.99,2873.6 v1(3764.99,2780) ; v1(7460,4800) 7409.99,4800 7394.99,4815 7409.99,4830 v1(7460,4830)
  Top Layer w40: R3.2@6463.04,3770 R2.1@6463.03,3850 ; C23.2@6810.54,2055 6810.54,1969.45 U20.2@6819.99,1960
  Mid-Layer 1 w40: v1(5944.99,3810) v1(6474.99,3810)
  Mid-Layer 2 w40: v1(6454.99,3810) 7159.99,3810 7409.99,4060 7408.99,4396 7408.99,4713.99 7460,4765 v1(7460,4830)
  Bottom Layer w20: v1(3670,3280) 3650,3280 JP10.1@3635,3295 3650,3310 v1(3670,3310)
  other v1: 5804.99,3565 5804.99,3590 5804.99,3615 5804.99,3640 5804.99,3665 5804.99,3690 5804.99,3715 5964.99,3810
+5V_ISO: C24.2 C27.2 C28.2 C44.2 C51.2 C55.2 INPUT_1.1 INPUT_2.1 INPUT_3.1 R18.2 U1.1 U14.5 U15.1 U16.1 U17.8 U18.8 U19.5 U20.4 | length 11024.9
  Top Layer w20: v1(2359.99,2305) 2395.55,2305 C44.2@2409.99,2319.45 ; v1(2359.99,2330) 2399.43,2330 C44.2@2409.99,2319.45 ; U1.1@2534.99,2255.85 2434.14,2255.85 2409.99,2280 C44.2@2409.99,2319.45 ; v1(3259.99,2310) 3295.59,2310 C51.2@3309.99,2324.5 ; v1(3259.99,2335) 3299.39,2335 C51.2@3309.99,2324.5 ; U15.1@3434.99,2260.8 3334.19,2260.8 3309.99,2285 C51.2@3309.99,2324.5 ; v1(4159.99,2310) 4195.59,2310 C55.2@4209.99,2324.5 ; v1(4159.99,2335) 4199.39,2335 C55.2@4209.99,2324.5 ; U16.1@4334.99,2260.8 4234.19,2260.8 4209.99,2285 C55.2@4209.99,2324.5 ; U14.5@5169.99,2410 5169.99,2435 5189.99,2455 5250.49,2455 C27.2@5309.99,2395.5 ; v1(5359.99,2410) 5324.44,2410 5309.99,2395.55 5320.54,2385 v1(5359.99,2385) 5509.99,2385 5564.99,2330 U17.8@5564.99,2245.85 ; U19.5@5804.99,2410 5804.99,2435 5824.99,2455 5885.49,2455 C28.2@5944.99,2395.5 ; v1(5994.99,2410) 5959.44,2410 5944.99,2395.55 5955.54,2385 v1(5994.99,2385) 6144.99,2385 6199.99,2330 U18.8@6199.99,2245.85
  Top Layer w40: U20.4@6619.99,1960 6629.44,1950.55 C24.2@6629.44,1700 ; R18.2@6908.03,1700 6907.99,1762 v1(6889.99,1780) ; R18.2@6908.03,1700 6908.03,1761.96 v1(6889.99,1780) ; v1(6924.99,1780) v1(6889.99,1780)
  Mid-Layer 2 w20: v1(5359.99,2385) v1(5359.99,2410) 5679.99,2410 5714.99,2445 5959.99,2445 v1(5994.99,2410) ; v1(5994.99,2385) v1(5994.99,2410) ; U20.4@6619.99,1960 6619.99,2020 6229.99,2410 v1(5994.99,2410)
  Mid-Layer 2 w40: v1@2359.99,2325 v1(2359.99,2305) 2309.99,2255 INPUT_1.1@2309.99,1800 2409.99,1700 6554.99,1700 6619.99,1765 U20.4@6619.99,1960 6619.99,1780 v1(6924.99,1780) ; 3209.99,1700 INPUT_2.1@3209.99,1800 ; INPUT_2.1@3209.99,1805 3209.99,2260 v1(3259.99,2310) v1@3259.99,2330 ; 4109.99,1700 INPUT_3.1@4109.99,1800 ; INPUT_3.1@4109.99,1805 4109.99,2260 v1(4159.99,2310) v1@4159.99,2330
A_CS: U4.3 U10.4 | length 2142.8
  Top Layer w10: U4.3@4474.99,3557.7 4474.99,3645 4524.99,3695 5459.99,3695 5594.99,3830 5594.99,4505 U10.4@5464.99,4635
A_DIAG: R54.2 U26.7 | length 3263.8
  Top Layer w10: v1(3105,3495) 3105,3445.01 3104.99,3245 3119.89,3230.1 U26.7@3174.32,3230.07 ; v1(5065,4335) R54.2@5096.96,4335
  Mid-Layer 2 w10: v1(3105,3495) 2960,3495 2920,3535 2920,3925 3260,4265 4995,4265 v1(5065,4335)
A_DIR: JP25.2 U4.1 U10.8 | length 2840.2
  Top Layer w10: U4.1@4575,3558.09 4574.99,3610 4619.99,3655 5469.99,3655 5634.99,3820 5634.99,4865 U10.8@5464.99,5035
  Top Layer w20: JP25.2@5329.99,4735 5374.99,4780 5374.99,4945 U10.8@5464.99,5035
A_EN: JP23.2 U4.15 U10.1 | length 2341.9
  Top Layer w10: U4.15@4524.99,3342.3 4524.99,3425 4449.99,3500 4449.99,3650 4514.99,3715 5454.99,3715 5574.99,3835 5574.99,4225 U10.1@5464.99,4335
  Top Layer w20: JP23.2@5329.99,4535 5329.99,4470 U10.1@5464.99,4335
A_MOTOR_1: A_MOTOR.1 JP23.1 U10.11 | length 1337.2
  Top Layer w20: U10.11@4964.99,4535 JP23.1@5269.99,4535
  Top Layer w40: U10.11@4964.99,4535 5174.99,4745 5174.99,4865 A_MOTOR.1@5609.99,5300
A_MOTOR_2: A_MOTOR.2 JP24.1 U10.12 | length 1154.3
  Top Layer w20: v1(5219.99,4635) JP24.1@5269.99,4635
  Top Layer w40: U10.12@4964.99,4635 5124.99,4795 5124.99,5015 A_MOTOR.2@5409.99,5300
  Mid-Layer 2 w20: U10.12@4964.99,4635 v1(5219.99,4635)
A_MOTOR_3: A_MOTOR.3 JP25.1 U10.13 | length 971.5
  Top Layer w20: v1(5219.99,4735) JP25.1@5269.99,4735
  Top Layer w40: U10.13@4964.99,4735 5074.99,4845 5074.99,5165 A_MOTOR.3@5209.99,5300
  Mid-Layer 2 w20: U10.13@4964.99,4735 v1(5219.99,4735)
A_MOTOR_4: A_MOTOR.4 JP26.2 U10.14 | length 801.1
  Top Layer w20: v1(5219.99,4835) JP26.2@5269.99,4835
  Top Layer w40: U10.14@4964.99,4835 5024.99,4895 5024.99,5285 A_MOTOR.4@5009.99,5300
  Mid-Layer 2 w20: U10.14@4964.99,4835 v1(5219.99,4835)
A_STEP: JP24.2 U4.2 U10.7 | length 2764.9
  Top Layer w10: U4.2@4525,3558.09 4524.99,3620 4579.99,3675 5464.99,3675 5614.99,3825 5614.99,4785 U10.7@5464.99,4935
  Top Layer w20: JP24.2@5329.99,4635 5409.99,4715 5409.99,4880 U10.7@5464.99,4935
C49_2: C49.2 R62.1 U15.3 | length 299.6
  Top Layer w10: U15.3@3534.99,2255.85 3534.99,2220 3554.99,2200 3604.99,2200 C49.2@3650.54,2155
  Top Layer w20: C49.2@3650.54,2155 R62.1@3771.95,2155
C50_2: C50.2 R63.1 U15.2 | length 302.3
  Top Layer w10: C50.2@3369.44,2155 3369.44,2159.45 3409.99,2200 3464.99,2200 3484.99,2220 U15.2@3484.99,2255.85
  Top Layer w20: R63.1@3248.03,2155 C50.2@3369.44,2155
C53_2: C53.2 R64.1 U16.3 | length 299.6
  Top Layer w10: U16.3@4434.99,2255.85 4434.99,2220 4454.99,2200 4504.99,2200 C53.2@4550.54,2155
  Top Layer w20: C53.2@4550.54,2160 R64.1@4671.95,2160
C54_2: C54.2 R65.1 U16.2 | length 294.7
  Top Layer w10: C54.2@4269.44,2160 4309.44,2200 4359.99,2200 4384.99,2225 U16.2@4384.99,2255.85
  Top Layer w20: R65.1@4148.03,2160 C54.2@4269.44,2160
CS_SD: MICROSD.2 U26.29 | length 314.3
  Top Layer w10: MICROSD.2@2154.66,3388.07 2457.67,3388.07 U26.29@2465.67,3380.07
D9_2: D9.2 FAN1.1 FAN2.1 JP27.1 JP28.1 | length 1878.9
  Top Layer w20: D9.2@6736.43,3815 6831.39,3910 7364.99,3910 7444.99,3990 7444.99,4340 7334.99,4450 7239.99,4450 7194.99,4495 FAN2.1@7195,4540
  Top Layer w40: FAN2.1@7195,4540 FAN1.1@7195,4710 7239.99,4755 JP27.1@7240,4815 JP28.1@7335,4815
DC: D6.2 Q5.2 SPEED.2 | length 932.3
  Top Layer w80: D6.2@6736.42,3670 6736.39,3393.6 6749.99,3380 7124.99,3380 SPEED.2@7309.99,3195
DTR: Q10.2 R19.2 U29.28 | length 153.7
  Top Layer w10: U29.28@2070.22,2900.03 2070.22,2989.47 Q10.2@2072.39,2991.64 2081.09,3000.34 R19.2@2129.99,3000.34
ESPRX: U26.34 U29.26 | length 501.3
  Top Layer w10: v1(2094.99,2950) 2109.62,2935.37 U29.26@2109.62,2900.03 ; v1(2359.99,3130) U26.34@2465.67,3130.07
  Mid-Layer 2 w10: v1(2094.99,2950) 2274.99,3130 v1(2359.99,3130)
ESPTX: U26.35 U29.25 | length 439.8
  Top Layer w10: U29.25@2129.32,2900.03 2129.99,2900.69 v1(2129.99,2950) ; v1(2359.99,3080) U26.35@2465.67,3080.07
  Mid-Layer 2 w10: v1(2129.99,2950) 2259.99,3080 v1(2359.99,3080)
FAN: Q7.1 U26.13 | length 4198.3
  Top Layer w10: U26.13@3174.32,3530.07 3174.39,3530 v1(3235,3530) ; v1(5104.99,3585) 5114.99,3595 5479.99,3595 5569.99,3505 6324.99,3505 6544.99,3725 7030,3725 7082.6,3777.6 Q7.1@7083.62,3777.6
  Mid-Layer 2 w10: v1(3235,3530) 3354.99,3410 3699.99,3410 3774.99,3485 4159.99,3485 4264.99,3590 4669.99,3590 4684.99,3575 5094.99,3575 v1(5104.99,3585)
GND: C1.1 C2.1 C4.1 C5.1 C6.1 C7.2 C8.1 C9.1 C10.1 C11.1 C12.1 C13.1 C14.1 C15.1 C16.2 C17.2 C18.1 C19.1 C20.2 C21.2 C22.1 C23.1 C25.1 C26.1 C35.1 C36.1 C37.1 C38.1 C39.1 C40.1 C41.1 C42.1 C43.1 C47.1 C48.1 C52.1 D1.1 D2.1 D6.1 D7.1 D8.1 D11.1 D12.1 ESC.1 JP8.1 JP29.1 JP30.1 JP31.1 JP32.1 JP33.1 JP34.1 LED1.1 MICROSD.6 MICROSD.10 MICROSD.11 MICROSD.12 MICROSD.13 PWR.2 PWROUT1.2 PWROUT2.2 Q3.2 Q4.2 Q6.2 Q7.2 R1.2 R8.2 R9.2 R12.1 RC1.1 RC2.1 RC3.1 RC4.1 SPEED.3 U1.5 U2.6 U2.9 U3.8 U3.13 U4.8 U4.13 U5.8 U5.13 U6.4 U7.2 U8.2 U9.10 U9.16 U10.10 U10.16 U11.10 U11.16 U12.10 U12.16 U15.5 U16.5 U17.4 U18.4 U20.1 U26.1 U26.15 U26.38 U26.39 U28.1 U29.3 USB1.0 USB1.5 | length 3926.1
  Top Layer w10: D1.1@1690.32,2961.6 USB1.0@1691.17,2893.33 ; USB1.0@1797.47,2847.07 1838.85,2847.07 1864.62,2821.3 U29.3@2030.9,2821.31 ; v1(1964.32,2581.6) 1964.32,2606.6 1984.32,2626.6 C40.1@2011.77,2626.6 ; v1(2105,3560) 2153.71,3560 MICROSD.6@2154.73,3561.02 2196.54,3561.02 C2.1@2225,3532.55 ; C41.1@3392.55,3410 3392.56,3497.56 JP33.1@3405,3510 JP34.1@3405,3610
  Top Layer w20: v1(1745,3170) MICROSD.12@1745.27,3130 ; v1(1745,3700) MICROSD.11@1745.27,3740 ; USB1.0@1797.47,2656.13 USB1.5@1797.47,2700.42 ; D12.1@1864.32,2587.6 1870.32,2581.6 v1(1894.32,2581.6) ; D11.1@1929.32,2587.6 1935.32,2581.6 v1(1964.32,2581.6) ; v1(2095,3700) 2127.24,3732.24 MICROSD.10@2127.24,3740 ; v1(2125,3200) 2125,3162.24 MICROSD.13@2127.24,3160 ; C15.1@2159.99,5025.55 2255.54,5025.55 U11.16@2264.99,5035 ; U26.38@2465.67,2930.07 v1(2550,2930) ; v1(3045,3580) v1(3045,3700) ; C18.1@3059.99,5025.55 3155.54,5025.55 U9.16@3164.99,5035 ; v1(3095,2930) U26.1@3174.32,2930.07 ; v1(3120,2930) 3272.56,2930 C43.1@3275,2932.45 ; C42.1@3275,3112.55 v1(3275,3145) ; v1(3305,2630) 3326.37,2630 U28.1@3344.45,2648.07 3322.53,2670 v1(3305,2670) ; v1(3609.99,2780) 3609.99,2812.7 C37.1@3629.99,2832.7 3649.99,2812.7 v1(3649.99,2780) ; R8.2@3664.99,3483.04 v1(3664.99,3530) ; v1(3734.99,3495) U3.8@3734.99,3557.7 ; v1(3935,3290) U3.13@3935,3342.29 ; C22.1@3959.99,5025.55 4055.54,5025.55 U12.16@4064.99,5035 ; C10.1@4154.99,3485.55 v1(4154.99,3535) ; v1(4225,3480) U4.8@4225,3557.7 ; v1(4425,3295) U4.13@4425,3342.3 ; C11.1@4644.99,3490.55 v1(4644.99,3540) ; v1(4714.99,3495) U5.8@4714.99,3557.7 ; C19.1@4859.99,5025.55 4955.54,5025.55 U10.16@4964.99,5035 ; v1(4915,3290) U5.13@4915,3342.29 ; C12.1@5134.99,3485.55 v1(5134.99,3535) ; v1(5834.99,4875) 5834.99,4830 D7.1@5849.99,4815 ; v1(5864.99,4875) 5864.99,4830 D7.1@5849.99,4815 ; Q3.2@6272.39,4301.38 6298.61,4301.38 v1(6299.99,4300) ; R12.1@6429.99,2883.04 v1(6429.99,2930) C13.1@6429.99,2984.45 ; v1(6429.99,4875) 6429.99,4830 D8.1@6444.99,4815 ; v1(6454.99,3290) 6454.99,3316.22 Q6.2@6461.37,3322.6 ; v1(6459.99,4875) 6459.99,4830 D8.1@6444.99,4815 ; U7.2@6538.14,2230.01 v1(6624.99,2230) ; U8.2@6538.14,2430.01 v1(6624.99,2430) ; U6.4@6659.99,2918.5 6659.99,2930 6669.99,2940 v1(6704.99,2940) ; v1(6664.99,2600) 6664.99,2653.04 R9.2@6666.95,2655 ; C14.1@6750.54,2825 v1(6804.99,2825) ; Q4.2@6772.39,4301.38 6798.61,4301.38 v1(6799.99,4300) ; v1(6989.99,3660) 6943.56,3660 D6.1@6933.56,3670 6948.56,3685 v1(6989.99,3685) ; v1(7070,3880) 7070,3866.02 Q7.2@7083.62,3852.4 7087.4,3852.4 7095,3860 v1(7095,3880) ; v1(7460,4510) 7435,4510 JP29.1@7420,4525 ; v1(7460,4540) 7435,4540 JP29.1@7420,4525 ; D7.1@5849.99,4815 D7.1@5849.99,4788.57 D7.1@5849.99,4815 ; D8.1@6444.99,4815 D8.1@6444.99,4788.57 D8.1@6444.99,4815 ; JP29.1@7420,4525 JP29.1@7400,4525 JP29.1@7420,4525
  other v1: 6709.99,2110 6739.99,2110 5654.99,2260 6284.99,2260 4559.99,2320 2759.99,2325 3659.99,2325 6024.99,2475 5384.99,2480 2525,2930 3230,2930 2790,3155 2860,3155 2930,3155 2790,3225 2860,3225 2930,3225 2790,3300 2860,3300 2930,3300 3395,3455 6114.99,3565 5729.99,3590 6114.99,3590 6114.99,3615 6114.99,3640 6114.99,3665 6114.99,3690 6114.99,3715 2795,3750 2619.99,3945 2644.99,3945 2669.99,3945 2694.99,3945 2719.99,3945 2744.99,3945 3514.99,3945 3539.99,3945 3564.99,3945 3589.99,3945 3614.99,3945 3639.99,3945 4404.99,3945 4429.99,3945 4454.99,3945 4479.99,3945 4504.99,3945 4529.99,3945 5319.99,3945 5344.99,3945 5369.99,3945 5394.99,3945 5419.99,3945 5444.99,3945 6589.99,3960 6614.99,3960 6639.99,3960 6664.99,3960 6689.99,3960 6714.99,3960 6739.99,3960 6764.99,3960 6789.99,3960 6814.99,3960 6839.99,3960 2619.99,4055 2644.99,4055 2669.99,4055 2694.99,4055 2719.99,4055 2744.99,4055 3514.99,4055 3539.99,4055 3564.99,4055 3589.99,4055 3614.99,4055 3639.99,4055 4409.99,4055 4434.99,4055 4459.99,4055 4484.99,4055 4509.99,4055 4534.99,4055 5319.99,4055 5344.99,4055 5369.99,4055 5394.99,4055 5419.99,4055 5444.99,4055 6405.3,4065.31 6444.67,4065.31 5729.99,4085 6405.3,4104.68 6444.67,4104.68 5834.99,4845 5864.99,4845 6429.99,4845 6459.99,4845
GND_ISO: C24.1 C27.1 C28.1 C44.1 C45.1 C46.1 C49.1 C50.1 C51.1 C53.1 C54.1 C55.1 INPUT_1.4 INPUT_2.4 INPUT_3.4 OUTPUT1.3 OUTPUT2.3 R18.1 U1.4 U14.2 U15.4 U16.4 U17.5 U18.5 U19.2 U20.3 | length 11820.3
  Top Layer w20: v1(2359.99,2390) 2399.44,2390 2409.99,2400.55 2414.44,2400.55 2489.99,2325 2664.99,2325 2684.99,2305 U1.4@2684.99,2255.85 ; v1(2359.99,2415) 2409.99,2415 C44.1@2409.99,2400.5 ; v1(3259.99,2395) 3299.44,2395 3309.99,2405.55 3314.44,2405.55 3389.99,2330 3564.99,2330 3584.99,2310 U15.4@3584.99,2260.85 ; v1(3259.99,2420) 3309.99,2420 C51.1@3309.99,2405.5 ; v1(4159.99,2395) 4199.44,2395 4209.99,2405.55 4214.44,2405.55 4289.99,2330 4464.99,2330 4484.99,2310 U16.4@4484.99,2260.85 ; v1(4159.99,2420) 4209.99,2420 C55.1@4209.99,2405.5 ; U14.2@5169.99,2300 5169.99,2275 5189.99,2255 5250.59,2255 C27.1@5309.99,2314.5 ; v1(5359.99,2300) 5324.44,2300 5309.99,2314.45 5320.54,2325 v1(5359.99,2325) 5389.99,2325 5414.99,2300 U17.5@5414.99,2245.85 ; U19.2@5804.99,2300 5804.99,2275 5824.99,2255 5885.59,2255 C28.1@5944.99,2314.5 ; v1(5994.99,2300) 5959.44,2300 5944.99,2314.45 5955.54,2325 v1(5994.99,2325) 6024.99,2325 6049.99,2300 U18.5@6049.99,2245.85 ; C45.1@2550.54,2155 2569.99,2155 2579.99,2145 v1(2609.99,2145) 2639.99,2145 2649.99,2155 C46.1@2669.44,2155 2654.99,2155 2639.99,2170 v1(2609.99,2170) 2579.99,2170 2564.99,2155 C45.1@2550.54,2155 ; C50.1@3450.54,2155 3460.54,2145 v1(3509.99,2145) 3559.44,2145 C49.1@3569.44,2155 3554.44,2170 v1(3509.99,2170) 3465.54,2170 C50.1@3450.54,2155 ; C54.1@4350.54,2160 4364.99,2160 4374.99,2170 v1(4409.99,2170) 4444.99,2170 4454.99,2160 4469.44,2160 4454.44,2145 v1(4409.99,2145) 4365.54,2145 C54.1@4350.54,2160
  Top Layer w40: U20.3@6719.99,1960 6719.99,1709.4 6710.59,1700 C24.1@6710.54,1700 R18.1@6831.95,1700
  Mid-Layer 2 w20: v1(5359.99,2325) 5359.99,2050 OUTPUT1.3@5609.99,1800 ; v1(5994.99,2325) 5994.99,2115 OUTPUT2.3@6309.99,1800
  Mid-Layer 2 w40: v1@2362.49,2390 2417.49,2390 ; v1@2362.49,2415 2417.49,2415 ; 2409.99,2395.5 2609.99,2195.5 2609.99,2165 2609.99,2100 INPUT_1.4@2909.99,1800 ; v1@3257.49,2395 3312.49,2395 ; v1@3257.49,2420 3312.49,2420 ; 3309.99,2400.5 3509.99,2200.5 3509.99,2165 3509.99,2140 3509.99,2105 INPUT_2.4@3809.99,1805 ; v1@4157.49,2395 4212.49,2395 ; v1@4157.49,2420 4212.49,2420 ; 4209.99,2400.5 4409.99,2200.5 v1@4409.99,2165 ; v1@4409.99,2140 4409.99,2105 INPUT_3.4@4709.99,1805
  Bottom Layer w40: INPUT_1.4@2909.99,1800 3004.99,1705 3009.99,1700 6459.99,1700 U20.3@6719.99,1960 ; 3809.99,1700 INPUT_2.4@3809.99,1800 ; 4709.99,1700 INPUT_3.4@4709.99,1800 ; 5609.99,1700 OUTPUT1.3@5609.99,1800 ; 6309.99,1700 OUTPUT2.3@6309.99,1800
GPIO0: JP34.2 Q10.3 U26.25 | length 1692.5
  Top Layer w10: Q10.3@2034.99,3078.36 v1(2034.99,3130) ; v1(2359.99,3580) 2360.06,3580.07 U26.25@2465.67,3580.07 2475.74,3570 v1(2985,3570) ; v1(3310,3610) JP34.2@3345,3610
  Mid-Layer 2 w10: v1(2034.99,3130) 2034.99,3320 2294.99,3580 v1(2359.99,3580) ; v1(2985,3570) 2999.99,3555 3164.99,3555 3219.99,3610 v1(3310,3610)
I2S_BCK: R8.1 U3.11 U4.11 U5.11 U26.36 | length 3354.1
  Top Layer w10: U26.36@2465.67,3030.07 v1(2550,3030) ; R8.1@3664.99,3406.96 3664.99,3405 3704.99,3405 3739.99,3440 v1(3835,3440) 3835,3342.31 v1(3835,3290) ; U4.11@4325,3342.3 v1(4325,3440) ; U5.11@4815,3342.31 v1(4815,3440)
  Mid-Layer 2 w10: v1(2550,3030) 2549.99,3420 2589.99,3460 2654.99,3460 2744.99,3370 3719.99,3370 3789.99,3440 v1(3835,3440) v1(4325,3440) v1(4815,3440)
I2S_DATA: U3.14 U26.33 | length 1666.9
  Top Layer w10: U26.33@2465.67,3180.07 2465.74,3180 v1(2580,3180) ; v1(3985,3290) U3.14@3984.99,3342.3
  Mid-Layer 2 w10: v1(2580,3180) 2629.99,3180 2689.99,3120 3104.99,3120 3239.99,3255 3949.99,3255 v1(3985,3290)
I2S_WS: U3.12 U4.12 U5.12 U26.28 | length 2729.8
  Top Layer w10: U26.28@2465.67,3430.07 2465.74,3430 v1(2640,3430) ; v1(3885,3290) 3885,3342.29 v1(3885,3415) ; U4.12@4375,3342.3 v1(4375,3415) ; U5.12@4865,3342.31 v1(4865,3415)
  Mid-Layer 2 w10: v1(2640,3430) 2720,3350 3729.99,3350 3794.99,3415 v1(3885,3415) v1(4375,3415) v1(4865,3415)
I2SO16: R14.1 U5.15 | length 2048.6
  Top Layer w10: U5.15@5014.99,3342.3 5014.99,3175 5114.99,3075 5724.99,3075 6354.99,2445 6354.99,2305.1 6413.09,2247 R14.1@6429.99,2246.96
I2SO17: R15.1 U5.1 | length 2081.7
  Top Layer w10: U5.1@5064.99,3557.7 5064.99,3440 5039.99,3415 5039.99,3180 5124.99,3095 5734.99,3095 6382.99,2447 R15.1@6429.99,2446.96
I2SO18: U5.2 U18.2 | length 1941.7
  Top Layer w10: U5.2@5014.99,3557.7 5014.99,3440 4989.99,3415 4989.99,3170 5104.99,3055 5714.99,3055 6149.99,2620 U18.2@6149.99,2464.15
I2SO19: U5.3 U18.3 | length 1941.7
  Top Layer w10: U5.3@4964.99,3557.7 4964.99,3500 4939.99,3475 4939.99,3190 5094.99,3035 5704.99,3035 6099.99,2640 U18.3@6099.99,2464.15
I2SO20: U5.4 U17.2 | length 1520.9
  Top Layer w10: U5.4@4914.99,3557.7 4914.99,3485 4889.99,3460 4889.99,3210 5084.99,3015 5354.99,3015 5514.99,2855 U17.2@5514.99,2464.15
I2SO21: U5.5 U17.3 | length 1520.9
  Top Layer w10: U5.5@4864.99,3557.7 4864.99,3450 4839.99,3425 4839.99,3230 5074.99,2995 5344.99,2995 5464.99,2875 U17.3@5464.99,2464.15
I2SO22: Q4.1 U5.6 | length 2474
  Top Layer w10: U5.6@4815,3558.09 4814.99,3595 4834.99,3615 5479.99,3615 5674.99,3810 5674.99,4215 5744.99,4285 6159.99,4285 6179.99,4265 6674.99,4265 6697.59,4287.6 Q4.1@6697.59,4301.38
I2SO23: Q3.1 U5.7 | length 2005.2
  Top Layer w10: U5.7@4765,3558.09 4764.99,3600 4799.99,3635 5474.99,3635 5654.99,3815 5654.99,4225 5731.39,4301.4 Q3.1@6197.59,4301.38